# Altium PCB ANSINv01.PcbDoc
Units mm, origin at the board's own origin, x right, y up, seen from the top; angles counter-clockwise.
Board outline 75.5 x 41 mm, 4 copper layers (Top Layer, Mid-Layer 1, Mid-Layer 2, Bottom Layer); 58 components, 49 nets, 243 pads, 167 vias.
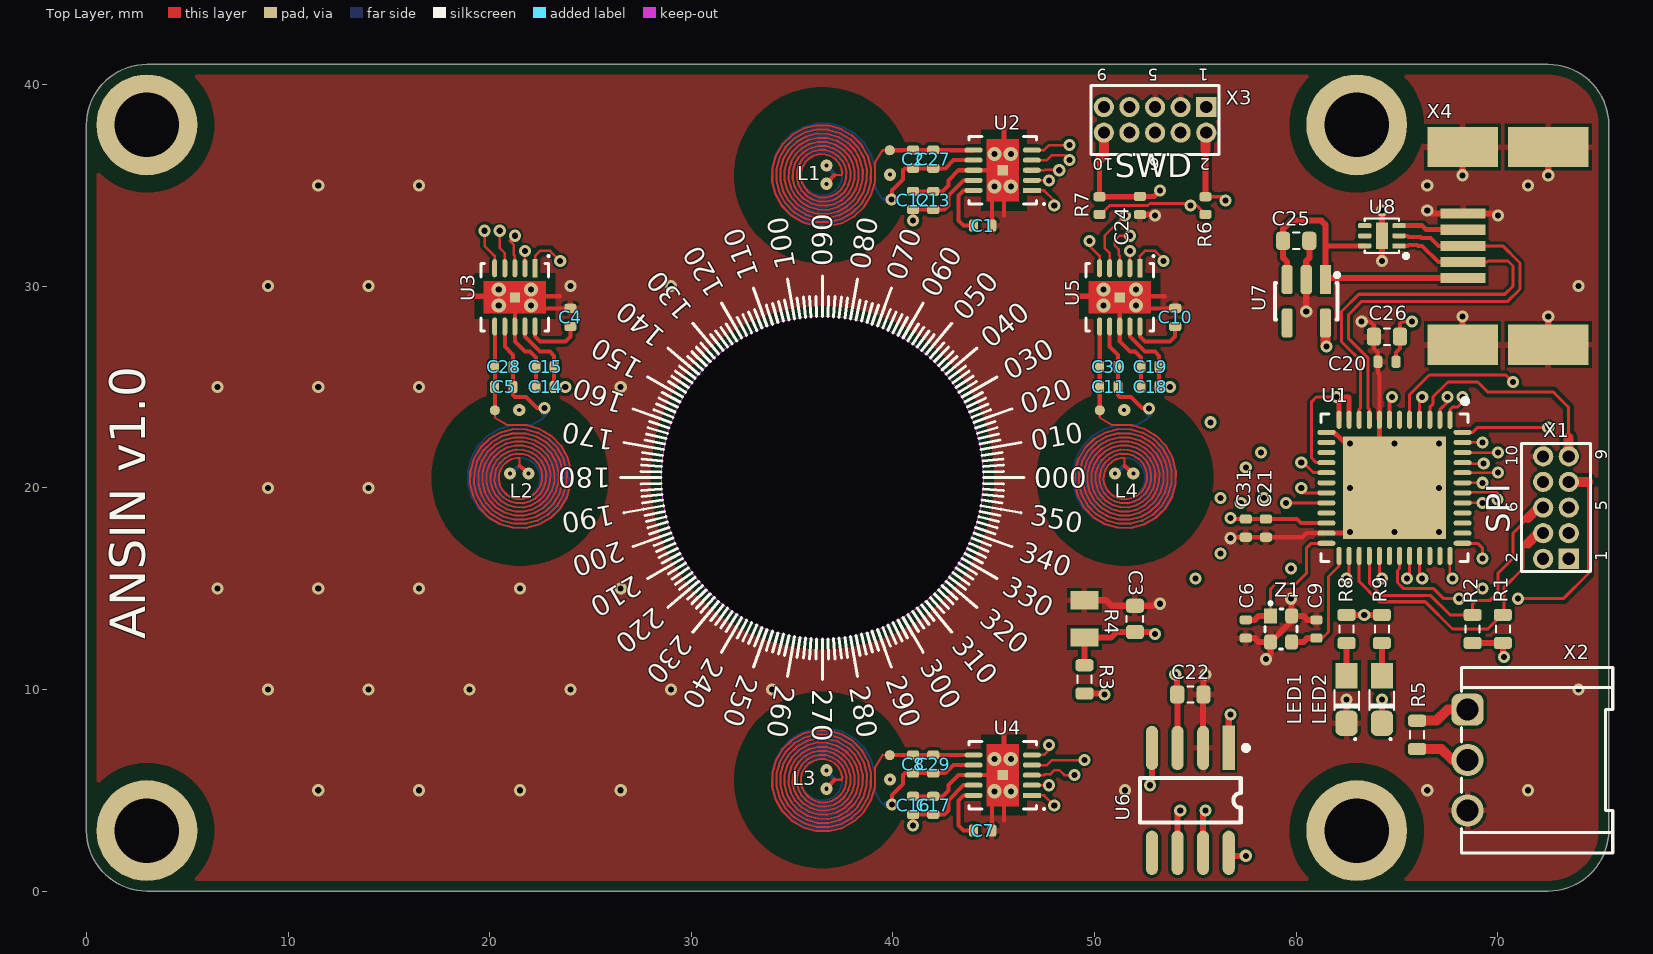
[diagram p0: Top Layer view]
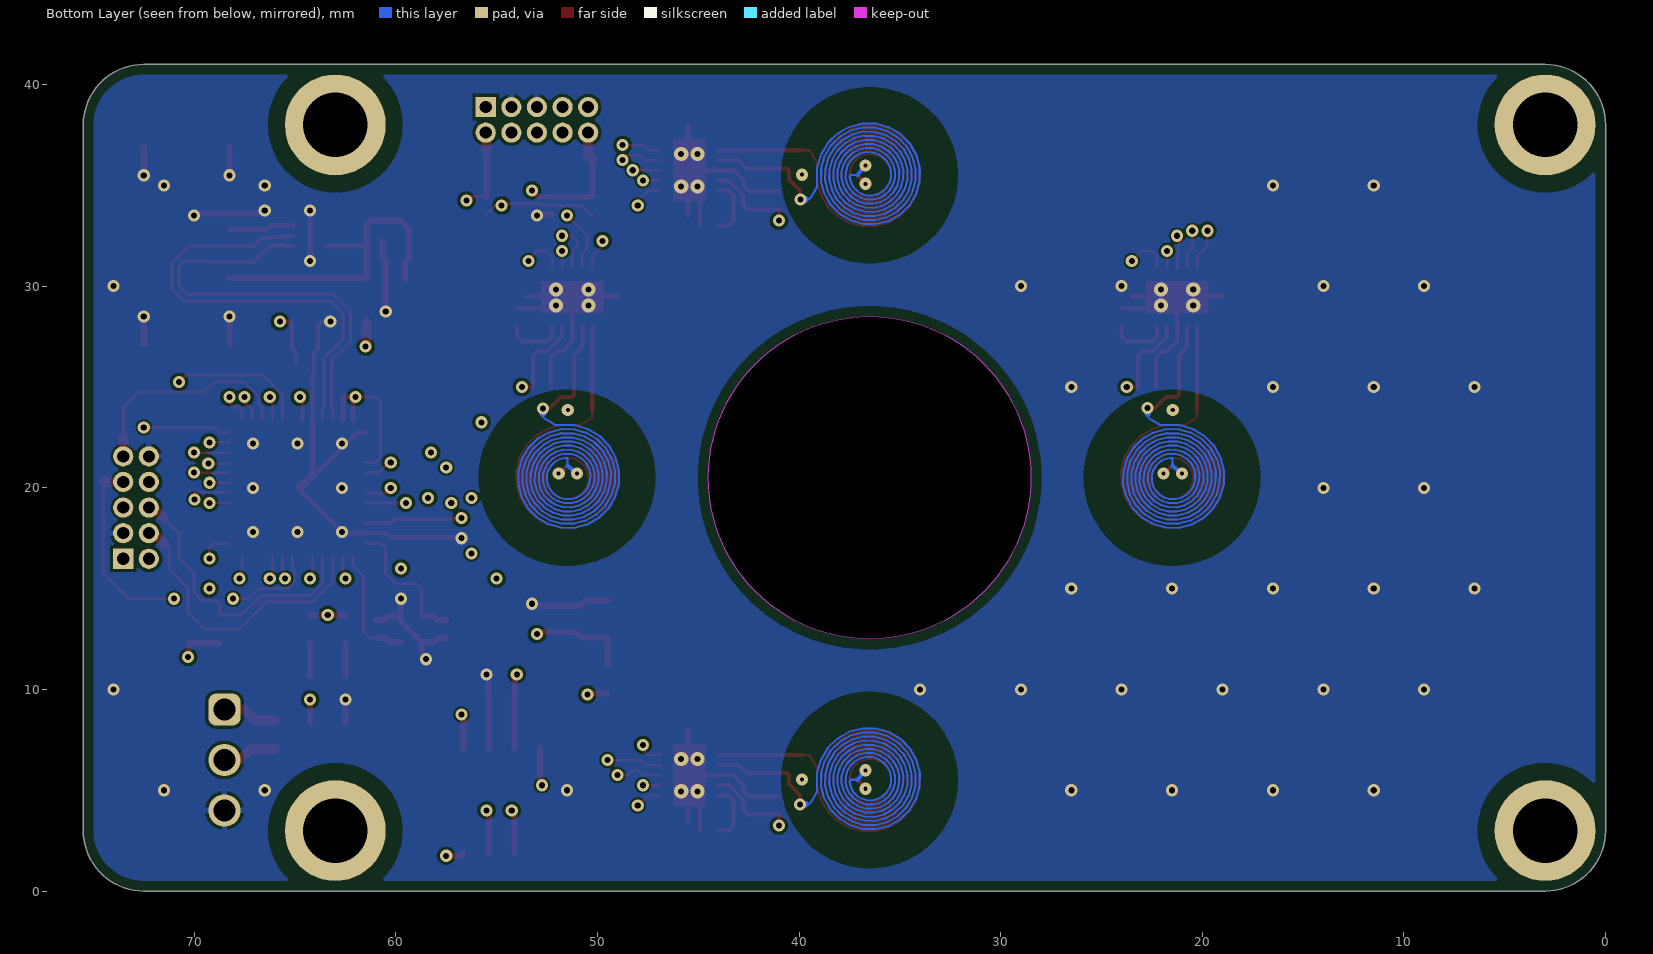
[diagram p1: Bottom Layer view, seen from below]
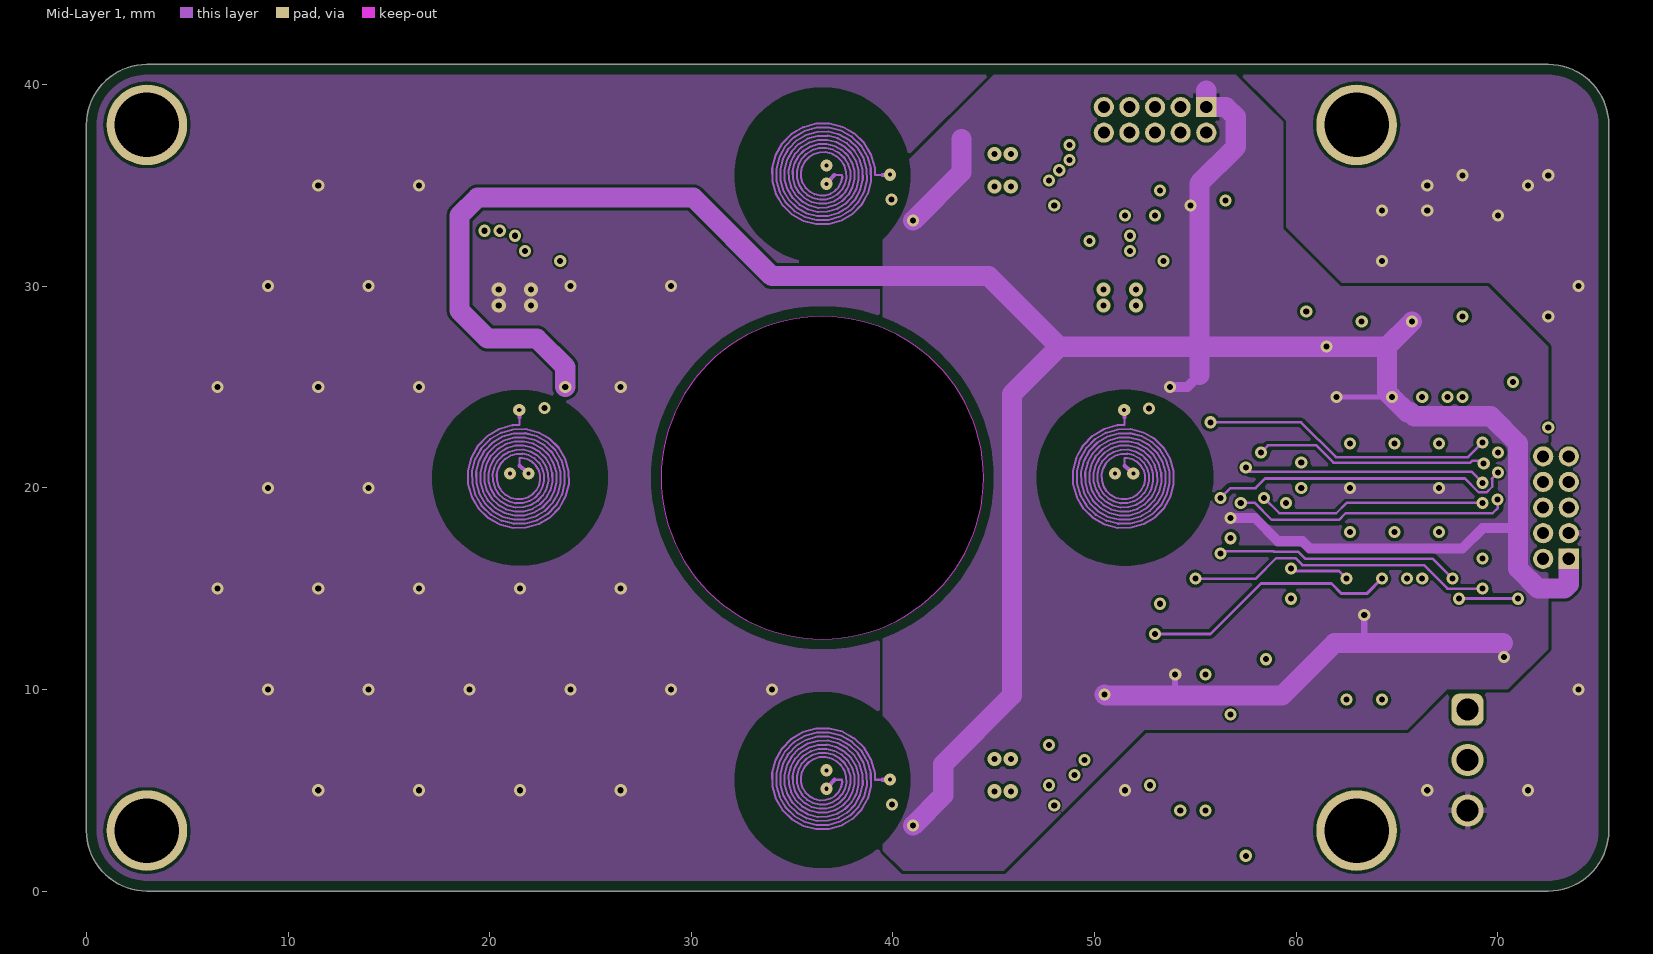
[diagram p2: Mid-Layer 1]
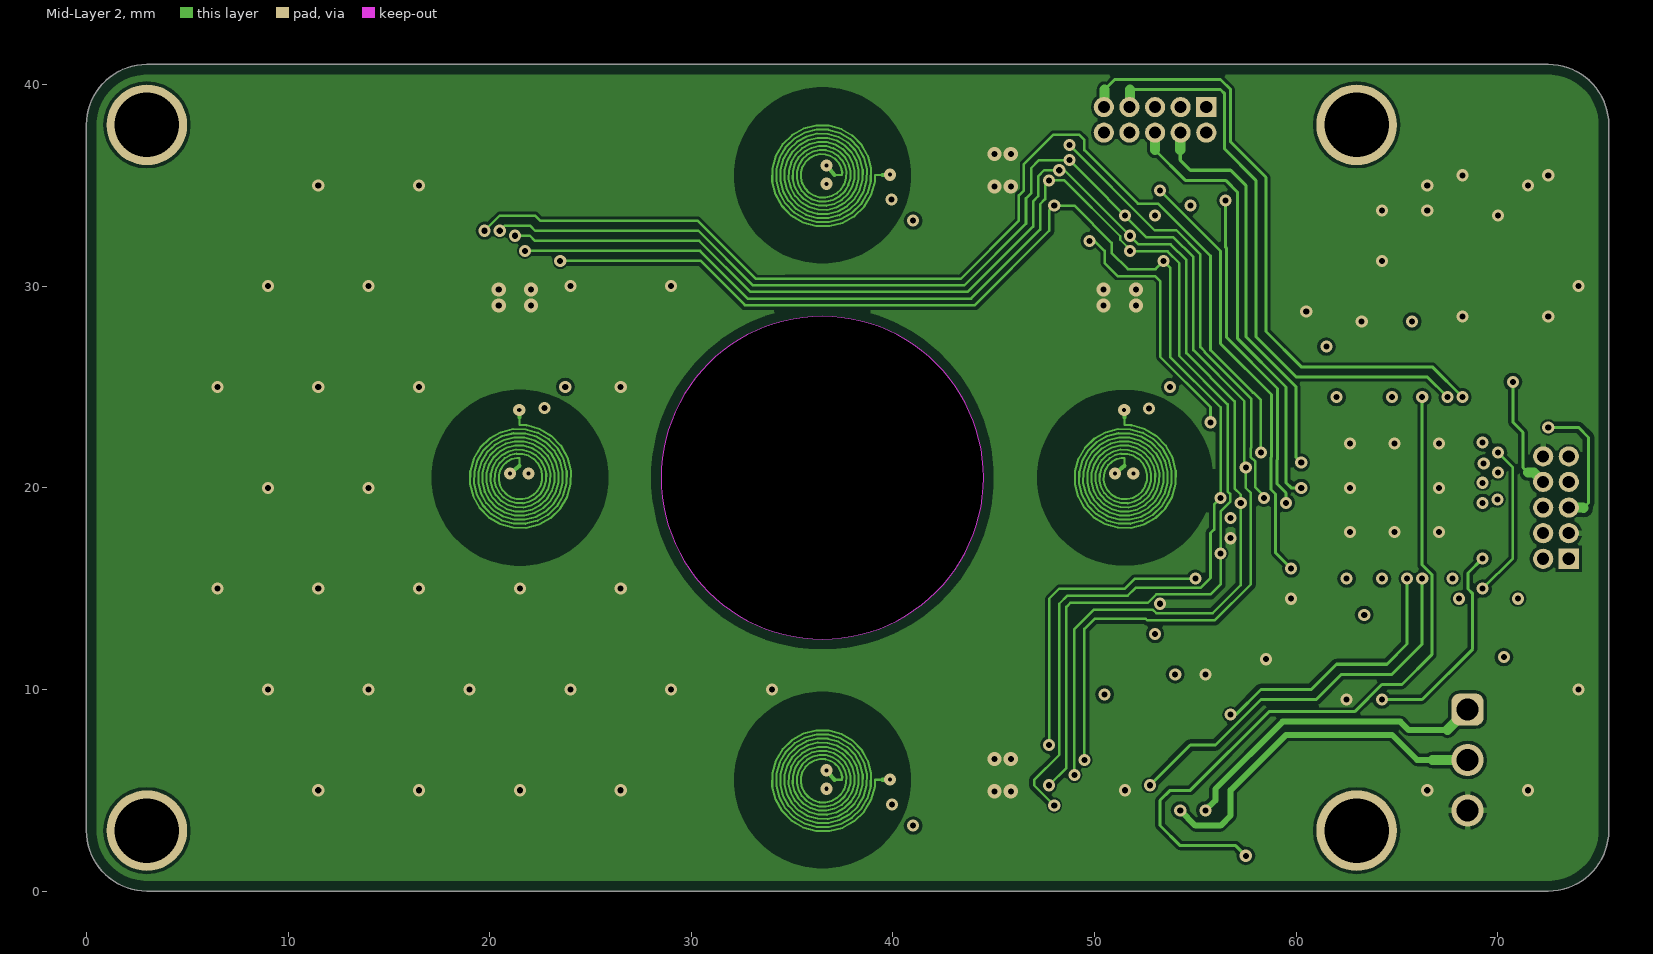
[diagram p3: Mid-Layer 2]
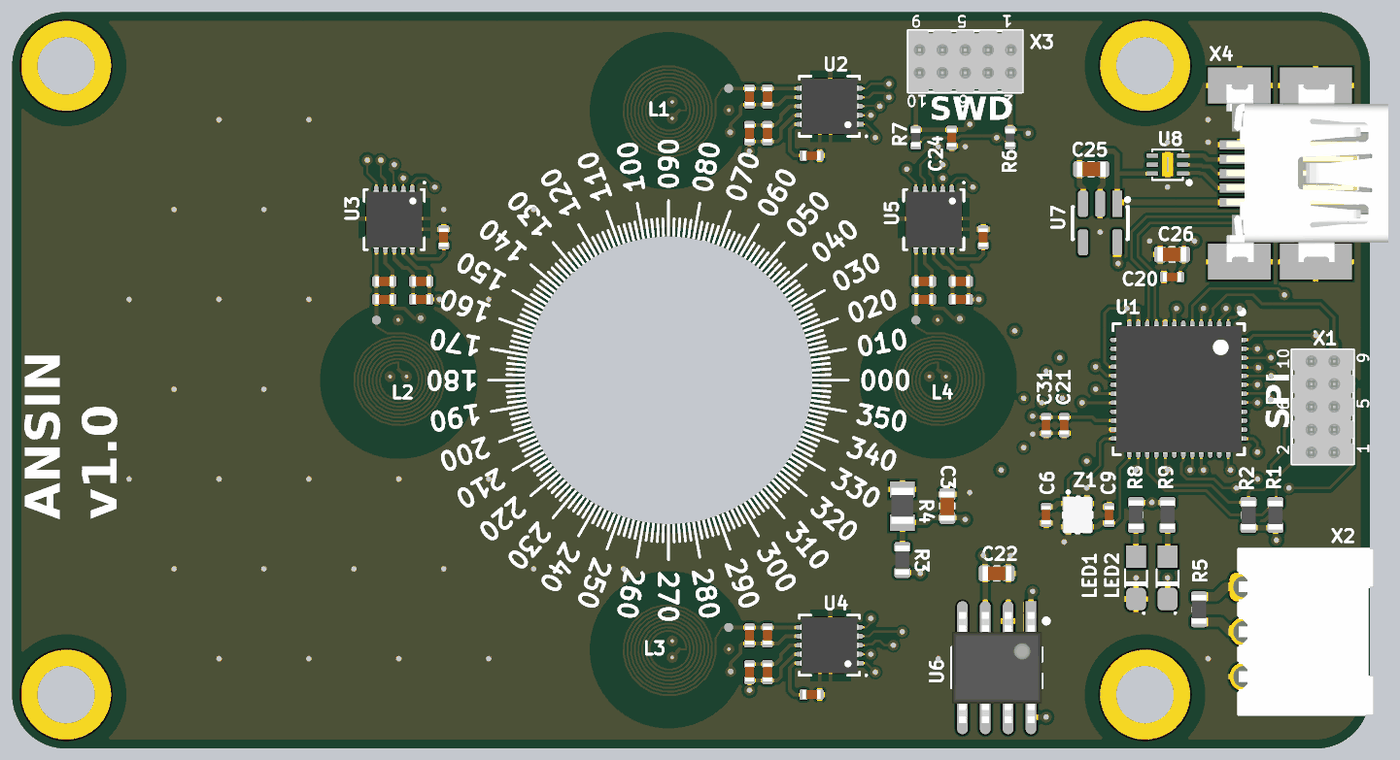
[diagram p4: 3D render of the assembled board from above, using the file's embedded part models]

## Layer stack, top to bottom
Top Solder: solder mask 0.0102, Solder Resist, Dk 3.5
Top Layer: signal copper 0.0356
Dielectric 1: dielectric 0.32, FR-4, Dk 4.8
Mid-Layer 1: signal copper 0.0356
Dielectric2: dielectric 0.32, FR-4, Dk 4.8
Mid-Layer 2: signal copper 0.0356
Dielectric3: dielectric 0.32, FR-4, Dk 4.8
Bottom Layer: signal copper 0.0356
Bottom Solder: solder mask 0.0102, Solder Resist, Dk 3.5

## Board outline
3,0 cw(c3,3) 0,3 0,38 cw(c3,38) 3,41 72.5,41 cw(c72.5,38) 75.5,38 75.5,3 cw(c72.5,3) 72.5,0
cut-out: 28.5,20.5 ccw(c36.5,20.5) 36.5,12.5 ccw(c36.5,20.5) 44.5,20.5 ccw(c36.5,20.5) 36.5,28.5 ccw(c36.5,20.5)

## Design rules (kind name [scope] priority, off if disabled: settings)
BoardOutlineClearance [(OnLayer('Bottom Layer') OR OnLayer('Top Layer') OR OnLayer('Mid-Layer 1') OR OnLayer('Mid-Layer 2'))] p1: gap=0.5 ignorepadtopadclearanceinfootprint=FALSE
Clearance Buses [(InNetClass('CAN_Bus') OR InNetClass('CLK_OUT') OR InNetClass('SPI_Bus'))] p1: gap=0.1 ignorepadtopadclearanceinfootprint=FALSE except(0: Arc-Hole Track-Hole SMDPad-Hole THPad-Hole Via-Hole Fill-Hole Poly-Hole Region-Hole Text-Hole; 0.2: Arc-Arc Arc-Track Arc-Poly Track-Track Track-Poly)
Clearance [All] p2: gap=0.15 ignorepadtopadclearanceinfootprint=FALSE except(0: Arc-Hole Track-Hole SMDPad-Hole THPad-Hole Via-Hole Fill-Hole Poly-Hole Region-Hole Text-Hole)
DiffPairsRouting [All] p1: maxlimit=1 minlimit=0.1 mostfreqgap=0.2 toplayer_minwidth=0.1 toplayer_maxwidth=1 toplayer_prefwidth=0.2 midlayer1_minwidth=0.1 midlayer1_maxwidth=1 midlayer1_prefwidth=0.2 midlayer2_minwidth=0.1 midlayer2_maxwidth=1 midlayer2_prefwidth=0.2 bottomlayer_minwidth=0.1 bottomlayer_maxwidth=1 bottomlayer_prefwidth=0.2 maxuncoupledlength=12.7
HoleSize [All] p1: absolutevalues=TRUE maxlimit=5 minlimit=0.025 maxpercent=80.000 minpercent=20.000
MinimumSolderMaskSliver [All] p1: minsoldermaskwidth=0.05
PolygonConnect "PolygonConnect Via" [All vs IsVia] p1: connectstyle=Direct reliefconductorwidth=0.254 reliefentries=4 polygonreliefangle="90 Angle" airgapwidth=0.254
PolygonConnect [All] p2: connectstyle=Relief reliefconductorwidth=0.3 reliefentries=4 polygonreliefangle="90 Angle" airgapwidth=0.15
RoutingVias [All] p1: holewidth=0.3 width=0.6 viastyle="Through Hole" minholewidth=0.2 minwidth=0.5 maxholewidth=3 maxwidth=5
SilkToSilkClearance [All] p1: silktosilkclearance=0
SilkToSolderMaskClearance [IsPad] p1: minsilkscreentomaskgap=0 clearancetoexposedcopper=TRUE
SolderMaskExpansion [All] p1: expansion=0.102 istentingtop=FALSE
Width [All] p1: maxlimit=10 minlimit=0.1 preferedwidth=0.3
25 further rules are at their usual default settings.

## Classes and differential pairs
net class CLK_OUT: CLK_OUT
net class CAN_Bus: CAN0_RX CAN0_TX
net class SPI_Bus: SPI0_SCK SPI0_SIN SPI0_SOUT SPI1_CLK SPI1_MISO SPI1_MOSI
differential pair USB: +USB_P -USB_N

## Components (designator, comment, footprint, x,y, rotation, side; value= is the part's Value field where it differs from the comment)
C1 "GRM155R71H153KA12J" 1005[0402] 44.452,33 r180 top
C2 "CBR04C101F3GAC" 1005[0402] 41,36.298 r90 top
C3 "CL10B104KA8NNND" 1608[0603] 52,13.5 r270 top
C4 "GRM155R71H153KA12J" 1005[0402] 24,28.452 r270 top
C5 "CBR04C101F3GAC" 1005[0402] 20.702,25 r180 top
C6 "04023U110FAT2A" 1005[0402] 57.5,13 r270 top
C7 "GRM155R71H153KA12J" 1005[0402] 44.452,3 r180 top
C8 "CBR04C101F3GAC" 1005[0402] 41,6.298 r90 top
C9 "04023U110FAT2A" 1005[0402] 61,13 r90 top
C10 "GRM155R71H153KA12J" 1005[0402] 54,28.452 r270 top
C11 "CBR04C101F3GAC" 1005[0402] 50.702,25 r180 top
C12 "C1005X6S1C105K050BC" 1005[0402] 41,34.25 r90 top
C13 "C0402C104K8PACTU" 1005[0402] 42,34.25 r90 top
C14 "C1005X6S1C105K050BC" 1005[0402] 22.75,25 r180 top
C15 "C0402C104K8PACTU" 1005[0402] 22.75,26 r180 top
C16 "C1005X6S1C105K050BC" 1005[0402] 41,4.25 r90 top
C17 "C0402C104K8PACTU" 1005[0402] 42,4.25 r90 top
C18 "C1005X6S1C105K050BC" 1005[0402] 52.75,25 r180 top
C19 "C0402C104K8PACTU" 1005[0402] 52.75,26 r180 top
C20 "C0402C104K8PACTU" 1005[0402] 64.5,26.25 r180 top
C21 "C0402C104K8PACTU" 1005[0402] 58.5,18 r270 top
C22 "CL10B104KA8NNND" 1608[0603] 54.75,9.75 r0 top
C24 "C0402C104K8PACTU" 1005[0402] 52.25,34 r270 top
C25 "CL10A105KO8NNNC" 1608[0603] 60,32.25 r0 top
C26 "CL10A105KO8NNNC" 1608[0603] 64.5,27.5 r180 top
C27 "CBR04C101F3GAC" 1005[0402] 42,36.298 r90 top
C28 "CBR04C101F3GAC" 1005[0402] 20.702,26 r180 top
C29 "CBR04C101F3GAC" 1005[0402] 42,6.298 r90 top
C30 "CBR04C101F3GAC" 1005[0402] 50.702,26 r180 top
C31 "C1005X6S1C105K050BC" 1005[0402] 57.5,18 r270 top
L1 "Coil" COIL_4LAYERS_8TURNS 36.5,35.5 r180 top net-tie
L2 "Coil" COIL_4LAYERS_8TURNS 21.5,20.5 r270 top net-tie
L3 "Coil" COIL_4LAYERS_8TURNS 36.5,5.5 r180 top net-tie
L4 "Coil" COIL_4LAYERS_8TURNS 51.5,20.5 r270 top net-tie
LED1 "SML-211UTT86" "0805 LED" 62.5,9.5 r270 top
LED2 "SML-211UTT86" "0805 LED" 64.25,9.5 r270 top
R1 "RL0603K004.7-1" 0603 70.25,13 r270 top
R2 "RL0603K004.7-1" 0603 68.75,13 r270 top
R3 "RL0603K010-1" 0603 49.5,10.5 r270 top
R4 "NCP21XV103J03RA" 0805 49.5,13.5 r270 top
R5 "RL0603E120-1" 0603 66,7.75 r270 top
R6 "MCR01MZPJ103" 0402 55.5,34 r270 top
R7 "MCR01MZPJ103" 0402 50.25,34 r90 top
R8 "RL0603K001-1" 0603 62.5,13 r90 top
R9 "RL0603K001-1" 0603 64.25,13 r90 top
U1 "MKS22FN256VFT12" "48-PIN QFN NXP" 64.875,20 r270 top locked
U2 "LDC1101DRCT" "TI S-PVSON-N10" 45.445,35.75 r180 top
U3 "LDC1101DRCT" "TI S-PVSON-N10" 21.25,29.445 r270 top
U4 "LDC1101DRCT" "TI S-PVSON-N10" 45.445,5.75 r180 top
U5 "LDC1101DRCT" "TI S-PVSON-N10" 51.25,29.445 r270 top
U6 "SN65HVD231D" SO-8 54.75,4.5 r180 top
U7 "LP5907QMFX-3.3Q1" SOT23-5 60.5,29.25 r180 top
U8 "PUSBM5V5X4-TL,115" DFN1616-6 64.25,32.5 r180 top
X1 "FTS-105-01-F-D" FTS-105-01-F-D 72.885,19.02 r90 top
X2 "1814854" 1814854 68.5,4 r180 top
X3 "FTS-105-01-F-D" FTS-105-01-F-D 53,38.25 r180 top
X4 "miniUSB Type AB" "USB AB 56579-0576 Molex" 74.5,32 r0 top
Z1 "ABM11-16.000MHZ-9-B1U-T" "4-SMD 2.00mm x 1.60mm" 59.25,13 r270 top

## Footprints (in the part's own frame and the unit in brackets; to place one, negate y for a bottom-side part, rotate by r counter-clockwise, add the part's x,y. Pads: shape width x height; smd on the part's side, far side on the other; paste and mask are expansions set on the pad)
"4-SMD 2.00mm x 1.60mm" [mm]
  rect 0.75x0.64 smd mask+0.06: 1(-0.65,-0.525)
  rrect50% 0.75x0.64 smd mask+0.06: 2(0.65,-0.525) 3(0.65,0.525) 4(-0.65,0.525)
  silkscreen extent -1.35,-0.8 1,0.8, body extent -1,-0.8 1,0.8, height 0.6
"48-PIN QFN NXP" [mm] "QFN, 48-Leads, Body 7.00x7.00mm, Pitch 0.50mm, Thermal Pad 5.10x5.10mm, IPC Medium Density"
  oval 0.9x0.25 smd mask+0.06: 1(-3.375,2.75) 2(-3.375,2.25) 3(-3.375,1.75) 4(-3.375,1.25) 5(-3.375,0.75) 6(-3.375,0.25) 7(-3.375,-0.25) 8(-3.375,-0.75) 9(-3.375,-1.25) 10(-3.375,-1.75) 11(-3.375,-2.25) 12(-3.375,-2.75) 25(3.375,-2.75) 26(3.375,-2.25) 27(3.375,-1.75) 28(3.375,-1.25) 29(3.375,-0.75) 30(3.375,-0.25) 31(3.375,0.25) 32(3.375,0.75) 33(3.375,1.25) 34(3.375,1.75) 35(3.375,2.25) 36(3.375,2.75)
  oval 0.25x0.9 smd mask+0.06: 13(-2.75,-3.375) 14(-2.25,-3.375) 15(-1.75,-3.375) 16(-1.25,-3.375) 17(-0.75,-3.375) 18(-0.25,-3.375) 19(0.25,-3.375) 20(0.75,-3.375) 21(1.25,-3.375) 22(1.75,-3.375) 23(2.25,-3.375) 24(2.75,-3.375) 37(2.75,3.375) 38(2.25,3.375) 39(1.75,3.375) 40(1.25,3.375) 41(0.75,3.375) 42(0.25,3.375) 43(-0.25,3.375) 44(-0.75,3.375) 45(-1.25,3.375) 46(-1.75,3.375) 47(-2.25,3.375) 48(-2.75,3.375)
  rect 5.1x5.1 smd: 49(0,0)
  silkscreen extent -4.42,-3.65 3.65,3.65, body extent -3.55,-3.55 3.55,3.55, height 0.65
0402 [mm] "Chip Resistor; Body 1.1 x 0.5 mm (LxW typ)"
  rrect50% 0.45x0.6 smd mask+0.05: 1(-0.435,0) 2(0.435,0)
  body extent -0.49,-0.25 0.51,0.25, height 0.35
0603 [mm] "Chip Resistor; Body 1.6 x 0.8 mm (LxW typ)"
  rrect50% 0.6x0.9 smd mask+0.06: 1(-0.7,0) 2(0.7,0)
  silkscreen extent -0.18,-0.35 0.18,0.35, body extent -0.79,-0.4 0.81,0.4, height 0.45
0805 [mm] "Chip Resistor; Body 2 x 1.3 mm (LxW typ)"
  rect 0.9x1.4 smd mask+0.06: 1(-0.925,0) 2(0.925,0)
  body extent -1,-0.62 1,0.63, height 0.6
"0805 LED" [mm] "0805 LED"
  rect 1.25x1.1 smd: 1(-1.175,0)
  rrect50% 1.25x1.1 smd: 2(1.175,0)
  silkscreen extent -0.48,-0.61 2.01,0.61, body extent -1.3,-0.6 1.3,0.6, height 1
1005[0402] [mm] "Chip Capacitor; Body 1.0 x 0.5 mm (LxW typ)"
  rrect50% 0.45x0.6 smd mask+0.05: 1(-0.452,0) 2(0.452,0)
  body extent -0.5,-0.25 0.5,0.25, height 0.5
1608[0603] [mm] "Chip Capacitor; Body 1.6 x 0.8 mm (LxW typ)"
  rrect50% 0.7x0.9 smd mask+0.05: 1(-0.65,0) 2(0.65,0)
  silkscreen extent -0.15,-0.41 0.15,0.41, body extent -0.79,-0.41 0.81,0.39, height 0.8
1814854 [mm]
  rrect50% 1.6x1.6 hole 1.1 mask+0.07: 1(0,-5)
  round 1.6 hole 1.1 mask+0.07: 2(0,-2.5) 3(0,0)
  silkscreen extent -7.2,-7.1 0.3,2.1, body extent -7.2,-7.1 0.6,2.1, height 5.01
COIL_4LAYERS_8TURNS [mm]
  round 0.5 smd mask+0.102: 1(-3.344,-1.242)
  round 0.5 smd far side mask+0.102: 2(-3.457,1.212)
  Top Layer lines w0.102: -0.596,-0.022 -0.979,-0.022 -0.987,-0.151 -0.929,-0.402 -0.806,-0.631 -0.627,-0.822 -0.402,-0.962 -0.147,-1.039 0.122,-1.047 0.386,-0.985 0.627,-0.856 0.827,-0.667 0.973,-0.431 1.054,-0.163 1.063,0.119 0.997,0.396 0.861,0.648 0.663,0.859 0.415,1.011 0.134,1.095 -0.161,1.104 -0.451,1.035 -0.715,0.892 -0.935,0.685 -1.094,0.425 -1.182,0.131 -1.19,-0.177 -1.118,-0.48 -0.969,-0.756 -0.751,-0.985 -0.48,-1.151 -0.174,-1.242 0.149,-1.25 0.464,-1.175 0.751,-1.019 0.99,-0.792 1.163,-0.509 1.257,-0.19 1.266,0.146 1.186,0.474 1.024,0.773 0.788,1.021 0.494,1.201 0.161,1.299 -0.188,1.307 -0.529,1.224 -0.84,1.055 -1.097,0.81 -1.284,0.504 -1.385,0.158 -1.393,-0.204 -1.307,-0.559 -1.131,-0.88 -0.876,-1.147 -0.559,-1.34 -0.2,-1.445 0.175,-1.454 0.543,-1.364 0.876,-1.181 1.153,-0.917 1.352,-0.588 1.46,-0.216 1.469,0.173 1.376,0.553 1.186,0.898 0.913,1.184 0.572,1.39 0.188,1.502 -0.215,1.51 -0.608,1.414 -0.965,1.218 -1.26,0.934 -1.473,0.582 -1.588,0.185 -1.597,-0.231 -1.497,-0.637 -1.294,-1.005 -1.001,-1.31 -0.637,-1.53 -0.227,-1.648 0.202,-1.657 0.621,-1.553 1.001,-1.344 1.315,-1.042 1.542,-0.666 1.664,-0.243 1.672,0.199 1.565,0.631 1.349,1.023 1.037,1.346 0.65,1.579 0.214,1.705 -0.242,1.714 -0.686,1.603 -1.089,1.38 -1.422,1.059 -1.662,0.661 -1.791,0.212 -1.8,-0.258 -1.686,-0.715 -1.456,-1.13 -1.126,-1.473 -0.716,-1.719 -0.254,-1.852 0.229,-1.86 0.7,-1.743 1.126,-1.506 1.478,-1.166 1.731,-0.745 1.867,-0.27 1.875,0.226 1.755,0.71 1.512,1.147 1.162,1.509 0.729,1.769 0.241,1.908 -0.268,1.917 -0.765,1.792 -1.214,1.543 -1.585,1.184 -1.852,0.739 -1.995,0.238 -2.003,-0.284 -1.875,-0.794 -1.619,-1.255 -1.25,-1.635 -0.794,-1.908 -0.281,-2.055 0.256,-2.063 0.778,-1.932 1.25,-1.669 1.64,-1.291 1.92,-0.823 2.07,-0.297 2.079,0.253 1.944,0.788 1.674,1.272 1.287,1.672 0.807,1.958 0.268,2.111 -0.295,2.12 -0.843,1.982 -1.339,1.705 -1.748,1.309 -2.041,0.818 -2.198,0.265 -2.206,-0.311 -2.065,-0.872 -1.782,-1.379 -1.375,-1.798 -0.873,-2.098 -0.307,-2.258 0.282,-2.266 0.856,-2.121 1.375,-1.832 1.803,-1.416 2.11,-0.902 2.273,-0.323 2.282,0.28 2.133,0.867 1.837,1.397 1.412,1.834 0.886,2.147 0.295,2.315 -0.322,2.323 -0.922,2.171 -1.464,1.868 -1.91,1.433 -2.23,0.896 -2.401,0.292 -2.409,-0.338 -2.254,-0.951 -1.944,-1.504 -1.5,-1.96 -0.951,-2.287 -0.334,-2.461 0.309,-2.47 0.935,-2.311 1.5,-1.994 1.966,-1.541 2.299,-0.98 2.476,-0.35 2.485,0.306 2.323,0.945 1.999,1.522 1.536,1.997 0.964,2.337 0.321,2.518 -0.349,2.526 -1,2.361 -1.588,2.031 -2.073,1.558 -2.42,0.974 -2.604,0.319 -2.613,-0.022 -2.613,-0.632 -2.978,-1.242 -3.344,-1.242
  Top Layer lines w0.203: -0.214,0.435 -0.596,-0.022
  Mid-Layer 1 lines w0.102: -0.596,-0.022 -0.979,-0.022 -0.987,0.106 -0.929,0.357 -0.806,0.586 -0.627,0.777 -0.402,0.917 -0.147,0.994 0.122,1.002 0.386,0.94 0.627,0.811 0.827,0.622 0.973,0.386 1.054,0.118 1.063,-0.164 0.997,-0.441 0.861,-0.693 0.663,-0.903 0.415,-1.056 0.134,-1.14 -0.161,-1.149 -0.451,-1.08 -0.715,-0.937 -0.935,-0.73 -1.094,-0.47 -1.182,-0.176 -1.19,0.133 -1.118,0.435 -0.969,0.711 -0.751,0.94 -0.48,1.106 -0.174,1.197 0.149,1.206 0.464,1.13 0.751,0.974 0.99,0.747 1.163,0.465 1.257,0.145 1.266,-0.191 1.186,-0.519 1.024,-0.818 0.788,-1.066 0.494,-1.246 0.161,-1.344 -0.188,-1.352 -0.529,-1.269 -0.84,-1.1 -1.097,-0.854 -1.284,-0.549 -1.385,-0.203 -1.393,0.159 -1.307,0.514 -1.131,0.836 -0.876,1.102 -0.559,1.295 -0.2,1.4 0.175,1.409 0.543,1.319 0.876,1.136 1.153,0.872 1.352,0.543 1.46,0.172 1.469,-0.218 1.376,-0.598 1.186,-0.943 0.913,-1.229 0.572,-1.435 0.188,-1.547 -0.215,-1.555 -0.608,-1.459 -0.965,-1.263 -1.26,-0.979 -1.473,-0.627 -1.588,-0.23 -1.597,0.186 -1.497,0.592 -1.294,0.96 -1.001,1.265 -0.637,1.485 -0.227,1.603 0.202,1.612 0.621,1.508 1.001,1.299 1.315,0.997 1.542,0.621 1.664,0.198 1.672,-0.244 1.565,-0.676 1.349,-1.068 1.037,-1.391 0.65,-1.624 0.214,-1.75 -0.242,-1.758 -0.686,-1.648 -1.089,-1.425 -1.422,-1.104 -1.662,-0.706 -1.791,-0.257 -1.8,0.213 -1.686,0.67 -1.456,1.085 -1.126,1.428 -0.716,1.674 -0.254,1.807 0.229,1.815 0.7,1.698 1.126,1.462 1.478,1.121 1.731,0.7 1.867,0.225 1.875,-0.271 1.755,-0.755 1.512,-1.192 1.162,-1.554 0.729,-1.814 0.241,-1.953 -0.268,-1.962 -0.765,-1.837 -1.214,-1.588 -1.585,-1.229 -1.852,-0.784 -1.995,-0.283 -2.003,0.24 -1.875,0.749 -1.619,1.21 -1.25,1.59 -0.794,1.863 -0.281,2.01 0.256,2.018 0.778,1.887 1.25,1.624 1.64,1.246 1.92,0.778 2.07,0.252 2.079,-0.298 1.944,-0.833 1.674,-1.317 1.287,-1.716 0.807,-2.003 0.268,-2.156 -0.295,-2.165 -0.843,-2.027 -1.339,-1.75 -1.748,-1.353 -2.041,-0.862 -2.198,-0.31 -2.206,0.266 -2.065,0.827 -1.782,1.335 -1.375,1.753 -0.873,2.053 -0.307,2.213 0.282,2.222 0.856,2.076 1.375,1.787 1.803,1.371 2.11,0.857 2.273,0.279 2.282,-0.325 2.133,-0.911 1.837,-1.442 1.412,-1.879 0.886,-2.192 0.295,-2.36 -0.322,-2.368 -0.922,-2.216 -1.464,-1.913 -1.91,-1.478 -2.23,-0.941 -2.401,-0.337 -2.409,0.293 -2.254,0.906 -1.944,1.459 -1.5,1.915 -0.951,2.242 -0.334,2.416 0.309,2.425 0.935,2.266 1.5,1.949 1.966,1.496 2.299,0.935 2.476,0.305 2.485,-0.351 2.323,-0.99 1.999,-1.567 1.536,-2.042 0.964,-2.382 0.321,-2.563 -0.349,-2.571 -1,-2.405 -1.588,-2.076 -2.073,-1.603 -2.42,-1.019 -2.604,-0.364 -2.613,-0.022 -2.978,-0.022
  Mid-Layer 1 lines w0.203: -0.214,0.435 -0.596,-0.022 ; -2.978,-0.022 -3.344,-0.022
  Mid-Layer 2 lines w0.102: -0.596,-0.022 -0.979,-0.022 -0.987,-0.151 -0.929,-0.402 -0.806,-0.631 -0.627,-0.822 -0.402,-0.962 -0.147,-1.039 0.122,-1.047 0.386,-0.985 0.627,-0.856 0.827,-0.667 0.973,-0.431 1.054,-0.163 1.063,0.119 0.997,0.396 0.861,0.648 0.663,0.859 0.415,1.011 0.134,1.095 -0.161,1.104 -0.451,1.035 -0.715,0.892 -0.935,0.685 -1.094,0.425 -1.182,0.131 -1.19,-0.177 -1.118,-0.48 -0.969,-0.756 -0.751,-0.985 -0.48,-1.151 -0.174,-1.242 0.149,-1.25 0.464,-1.175 0.751,-1.019 0.99,-0.792 1.163,-0.509 1.257,-0.19 1.266,0.146 1.186,0.474 1.024,0.773 0.788,1.021 0.494,1.201 0.161,1.299 -0.188,1.307 -0.529,1.224 -0.84,1.055 -1.097,0.81 -1.284,0.504 -1.385,0.158 -1.393,-0.204 -1.307,-0.559 -1.131,-0.88 -0.876,-1.147 -0.559,-1.34 -0.2,-1.445 0.175,-1.454 0.543,-1.364 0.876,-1.181 1.153,-0.917 1.352,-0.588 1.46,-0.216 1.469,0.173 1.376,0.553 1.186,0.898 0.913,1.184 0.572,1.39 0.188,1.502 -0.215,1.51 -0.608,1.414 -0.965,1.218 -1.26,0.934 -1.473,0.582 -1.588,0.185 -1.597,-0.231 -1.497,-0.637 -1.294,-1.005 -1.001,-1.31 -0.637,-1.53 -0.227,-1.648 0.202,-1.657 0.621,-1.553 1.001,-1.344 1.315,-1.042 1.542,-0.666 1.664,-0.243 1.672,0.199 1.565,0.631 1.349,1.023 1.037,1.346 0.65,1.579 0.214,1.705 -0.242,1.714 -0.686,1.603 -1.089,1.38 -1.422,1.059 -1.662,0.661 -1.791,0.212 -1.8,-0.258 -1.686,-0.715 -1.456,-1.13 -1.126,-1.473 -0.716,-1.719 -0.254,-1.852 0.229,-1.86 0.7,-1.743 1.126,-1.506 1.478,-1.166 1.731,-0.745 1.867,-0.27 1.875,0.226 1.755,0.71 1.512,1.147 1.162,1.509 0.729,1.769 0.241,1.908 -0.268,1.917 -0.765,1.792 -1.214,1.543 -1.585,1.184 -1.852,0.739 -1.995,0.238 -2.003,-0.284 -1.875,-0.794 -1.619,-1.255 -1.25,-1.635 -0.794,-1.908 -0.281,-2.055 0.256,-2.063 0.778,-1.932 1.25,-1.669 1.64,-1.291 1.92,-0.823 2.07,-0.297 2.079,0.253 1.944,0.788 1.674,1.272 1.287,1.672 0.807,1.958 0.268,2.111 -0.295,2.12 -0.843,1.982 -1.339,1.705 -1.748,1.309 -2.041,0.818 -2.198,0.265 -2.206,-0.311 -2.065,-0.872 -1.782,-1.379 -1.375,-1.798 -0.873,-2.098 -0.307,-2.258 0.282,-2.266 0.856,-2.121 1.375,-1.832 1.803,-1.416 2.11,-0.902 2.273,-0.323 2.282,0.28 2.133,0.867 1.837,1.397 1.412,1.834 0.886,2.147 0.295,2.315 -0.322,2.323 -0.922,2.171 -1.464,1.868 -1.91,1.433 -2.23,0.896 -2.401,0.292 -2.409,-0.338 -2.254,-0.951 -1.944,-1.504 -1.5,-1.96 -0.951,-2.287 -0.334,-2.461 0.309,-2.47 0.935,-2.311 1.5,-1.994 1.966,-1.541 2.299,-0.98 2.476,-0.35 2.485,0.306 2.323,0.945 1.999,1.522 1.536,1.997 0.964,2.337 0.321,2.518 -0.349,2.526 -1,2.361 -1.588,2.031 -2.073,1.558 -2.42,0.974 -2.604,0.319 -2.613,-0.022 -2.978,-0.022
  Mid-Layer 2 lines w0.203: -0.214,-0.48 -0.596,-0.022 ; -2.978,-0.022 -3.344,-0.022
  Bottom Layer region: -3.425,1.35 -3.125,1.35 -3.025,1.25 -3.025,1.15 -3.125,1.05 -3.225,1.05 -3.425,1.05
  Bottom Layer lines w0.1: -2.937,1.128 -3.025,1.2
  Bottom Layer lines w0.102: -0.596,-0.022 -0.979,-0.022 -0.987,0.106 -0.929,0.357 -0.806,0.586 -0.627,0.777 -0.402,0.917 -0.147,0.994 0.122,1.002 0.386,0.94 0.627,0.811 0.827,0.622 0.973,0.386 1.054,0.118 1.063,-0.164 0.997,-0.441 0.861,-0.693 0.663,-0.903 0.415,-1.056 0.134,-1.14 -0.161,-1.149 -0.451,-1.08 -0.715,-0.937 -0.935,-0.73 -1.094,-0.47 -1.182,-0.176 -1.19,0.133 -1.118,0.435 -0.969,0.711 -0.751,0.94 -0.48,1.106 -0.174,1.197 0.149,1.206 0.464,1.13 0.751,0.974 0.99,0.747 1.163,0.465 1.257,0.145 1.266,-0.191 1.186,-0.519 1.024,-0.818 0.788,-1.066 0.494,-1.246 0.161,-1.344 -0.188,-1.352 -0.529,-1.269 -0.84,-1.1 -1.097,-0.854 -1.284,-0.549 -1.385,-0.203 -1.393,0.159 -1.307,0.514 -1.131,0.836 -0.876,1.102 -0.559,1.295 -0.2,1.4 0.175,1.409 0.543,1.319 0.876,1.136 1.153,0.872 1.352,0.543 1.46,0.172 1.469,-0.218 1.376,-0.598 1.186,-0.943 0.913,-1.229 0.572,-1.435 0.188,-1.547 -0.215,-1.555 -0.608,-1.459 -0.965,-1.263 -1.26,-0.979 -1.473,-0.627 -1.588,-0.23 -1.597,0.186 -1.497,0.592 -1.294,0.96 -1.001,1.265 -0.637,1.485 -0.227,1.603 0.202,1.612 0.621,1.508 1.001,1.299 1.315,0.997 1.542,0.621 1.664,0.198 1.672,-0.244 1.565,-0.676 1.349,-1.068 1.037,-1.391 0.65,-1.624 0.214,-1.75 -0.242,-1.758 -0.686,-1.648 -1.089,-1.425 -1.422,-1.104 -1.662,-0.706 -1.791,-0.257 -1.8,0.213 -1.686,0.67 -1.456,1.085 -1.126,1.428 -0.716,1.674 -0.254,1.807 0.229,1.815 0.7,1.698 1.126,1.462 1.478,1.121 1.731,0.7 1.867,0.225 1.875,-0.271 1.755,-0.755 1.512,-1.192 1.162,-1.554 0.729,-1.814 0.241,-1.953 -0.268,-1.962 -0.765,-1.837 -1.214,-1.588 -1.585,-1.229 -1.852,-0.784 -1.995,-0.283 -2.003,0.24 -1.875,0.749 -1.619,1.21 -1.25,1.59 -0.794,1.863 -0.281,2.01 0.256,2.018 0.778,1.887 1.25,1.624 1.64,1.246 1.92,0.778 2.07,0.252 2.079,-0.298 1.944,-0.833 1.674,-1.317 1.287,-1.716 0.807,-2.003 0.268,-2.156 -0.295,-2.165 -0.843,-2.027 -1.339,-1.75 -1.748,-1.353 -2.041,-0.862 -2.198,-0.31 -2.206,0.266 -2.065,0.827 -1.782,1.335 -1.375,1.753 -0.873,2.053 -0.307,2.213 0.282,2.222 0.856,2.076 1.375,1.787 1.803,1.371 2.11,0.857 2.273,0.279 2.282,-0.325 2.133,-0.911 1.837,-1.442 1.412,-1.879 0.886,-2.192 0.295,-2.36 -0.322,-2.368 -0.922,-2.216 -1.464,-1.913 -1.91,-1.478 -2.23,-0.941 -2.401,-0.337 -2.409,0.293 -2.254,0.906 -1.944,1.459 -1.5,1.915 -0.951,2.242 -0.334,2.416 0.309,2.425 0.935,2.266 1.5,1.949 1.966,1.496 2.299,0.935 2.476,0.305 2.485,-0.351 2.323,-0.99 1.999,-1.567 1.536,-2.042 0.964,-2.382 0.321,-2.563 -0.349,-2.571 -1,-2.405 -1.588,-2.076 -2.073,-1.603 -2.42,-1.019 -2.604,-0.364 -2.613,-0.022 -2.613,0.587 -2.937,1.128
  Bottom Layer lines w0.203: -0.214,-0.48 -0.596,-0.022
DFN1616-6 [mm] "NXP  DFN1616-6 (SOT1189-1/XSON6)"
  rect 0.65x0.25 smd mask+0.05: 1(-0.85,0.5)
  rrect50% 0.65x0.25 smd mask+0.05: 2(-0.849,0) 3(-0.85,-0.5) 4(0.85,-0.5) 5(0.849,0) 6(0.85,0.5)
  rect 0.6x1.3 smd paste-0.25 mask+0.05: 7(0,0)
  silkscreen extent -1.3,-0.85 0.85,1.1, body extent -0.85,-0.85 0.85,0.85, height 0.5
FTS-105-01-F-D [mm]
  rect 1x1 hole 0.6 mask+0.06: 1(-2.54,-0.635)
  round 1 hole 0.6 mask+0.06: 2(-2.54,0.635) 3(-1.27,-0.635) 4(-1.27,0.635) 5(0,-0.635) 6(0,0.635) 7(1.27,-0.635) 8(1.27,0.635) 9(2.54,-0.635) 10(2.54,0.635)
  silkscreen extent -3.17,-1.71 3.18,1.71, body extent -3.17,-1.71 3.18,1.71, height 3.92
SO-8 [mm] "Small Outline; 8 Leads; Body Width 3.9 mm; Pitch 1.27 mm"
  rect 0.6x2.2 smd: 1(-1.905,-2.6)
  oval 0.6x2.2 smd: 2(-0.635,-2.6) 3(0.635,-2.6) 4(1.905,-2.6) 5(1.905,2.6) 6(0.635,2.6) 7(-0.635,2.6) 8(-1.905,2.6)
  silkscreen extent -2.88,-2.72 2.5,1.1, body extent -2.51,-3.09 2.49,3.09, height 2.16
SOT23-5 [mm] "SOT-23/SC-74A; 5 Leads; Body 3.1 x 3 mm, inc. leads (LxW max)"
  rect 0.55x1.45 smd: 1(-0.95,-1.075)
  rrect50% 0.55x1.45 smd: 2(0,-1.075) 3(0.95,-1.075) 4(0.95,1.075) 5(-0.95,1.075)
  silkscreen extent -1.63,-1.4 1.55,0.9, body extent -1.6,-0.9 1.6,0.9, height 1
"TI S-PVSON-N10" [mm] "SON, 10-Leads, Body 3.00x3.00mm, Pitch 0.50mm, Thermal Pad 2.40x1.49mm, IPC Medium Density"
  rect 0.9x0.25 smd mask+0.06: 1(-1.445,1)
  oval 0.9x0.25 smd mask+0.06: 2(-1.445,0.5) 3(-1.445,0) 4(-1.445,-0.5) 5(-1.445,-1) 6(1.445,-1) 7(1.445,-0.5) 8(1.445,0) 9(1.445,0.5) 10(1.445,1)
  rect 0.5x0.5 smd mask+0.06: 11(0,0)
  Top Layer region: -0.8,-1.55 0.8,-1.55 0.8,1.55 -0.8,1.55
  silkscreen extent -2.1,-1.68 1.67,1.72, body extent -1.6,-1.55 1.6,1.55, height 1
"USB AB 56579-0576 Molex" [mm] "USB AB 56579-0576 Molex"
  rect 2.25x0.5 smd: 1(-6.225,-1.6) 2(-6.225,-0.8) 3(-6.225,0) 4(-6.225,0.8) 5(-6.225,1.6)
  rect 3.5x2 smd: MP(-6.25,-4.9) MP(-6.25,4.9)
  rect 4x2 smd: MP(-2,-4.9) MP(-2,4.9)
  body extent -6.97,-4.93 2.03,4.98, height 3.96

## Part data
C1 C4 C7 C10: "15 nF ±10%, 50V, X7R 0402, -55°C ~ 125°C"
C2 C5 C8 C11 C27 C28 C29 C30: "100pF ±1% 25V,High Q, C0G, NP0 0402"
C3 C22: library part CVNF100K0603-25, "0.1 uF, 50V, 10% , X7R,  0603 SMD MLC Capacitor"
C6 C9: "11 pF, 25V, +-1%, NP0/COG, 0402, -55..+125"
C12 C14 C16 C18 C31: "1 µF ±10% 16V, Low ESL X6S, 0402"
C13 C15 C17 C19 C20 C21 C24: "0.1 uF, 10V, 10% , X5R,  0402, -55°C ~ 85°C"
C25 C26: "1.0 uF, 16V, 10%, X5R, 0603, -55..85 С"
L1 L2 L3 L4: library part Coil_4layers_8turns, "Coil_4layers_8turns"
LED1 LED2: "0805 red LED, hibright, 2 mA, 1.8V, 130°"
R1 R2: "4.7 K, 1%, 0603, SMD Resistor, Taped"
R3: "10 K, 1%, 0603, SMD Resistor, Taped"
R4: "Thermistor 10k, 0805, NTC"
R5: "120 R, 1%, 0603, SMD Resistor, Taped"
R6 R7: "10 K, 0402, Thick Film, -55..+155"
R8 R9: "1 K, 1%, 0603, SMD Resistor, Taped"
U1: "ARM® Cortex®-M4 Kinetis KS22 Microcontroller IC 32-Bit 120MHz 256KB (256K x 8) FLASH 48-QFN (7x7)"
U2 U3 U4 U5: "Inductance-to-Digital Converter 16 b, 24 bit 150k, 180k SPI, -40°C ~ 125°C,  10-VSON (3x3)"
U6: "3.3-V CAN TRANSCEIVERS SO-8"
U7: "LDO 3.3 V, 250 mA, Vin < 5.5V, Iq < 12uA, -40..+125 C, SOT23-5"
U8: "TVS DIODE 5.5VWM 12VC 6HXSON"
X1 X3: "Board-To-Board Connector, Vertical, FTS Series, Through Hole, Header, 10, 1.27 mm"
X2: "SSL Connector 3 Position Header, Male Pins Board to Cable/Wire 0.098\" (2.50mm) Solder"
X4: library part "USB AB 56579-0576", "SMD USB - OTG, miniUSB Type AB"
Z1: "16 MHz, 9 pF, ±10ppm, 2.00mm x 1.60mm, -20°C ~ 70°C"

## Free pads (board coordinates)
  round 5 / inner round 4 / far side round 5 hole 3.2 unplated: 0(3,3) 0(3,38) 0(63,3) 0(63,38)

## Via types
v1: diameter 0.6, hole 0.3, Top Layer to Bottom Layer, tented both sides, 131 vias
v2: diameter 0.7/0.7/0.7/0.7 (per signal layer), hole 0.3, Top Layer to Bottom Layer, 16 vias
v3: diameter 0.61/0.61/0.61/0.61 (per signal layer), hole 0.2, Top Layer to Bottom Layer, tented both sides, 12 vias
v4: diameter 0.6, hole 0.3, Top Layer to Bottom Layer, 8 vias

## Nets (pads, with @x,y where several pads share a name; then routed paths per layer and width w, separated by ;. In a path a pad name is that pad's centre, name@x,y a point inside that pad or via, vN(x,y) a via of type N, cw(c..) or ccw(c..) an arc to the next point about the centre after c; other vN are vias at no path point)
+3V3: C12.1 C13.1 C14.1 C15.1 C16.1 C17.1 C18.1 C19.1 C20.1 C21.1 C22.1 C26.1 C31.1 R1.2 R2.2 R3.2 R6.2 R7.1 R8.2 R9.2 U1.7 U1.11 U1.12 U1.16 U1.22 U2.9 U3.9 U4.9 U5.9 U6.3 U7.5 X1.1 X3.1 | length 225.2
  Top Layer w0.15: R7.1 50.315,33.565 50.75,34 52.65,34 52.75,34.1 54.65,34.1 v1(54.75,34) 55.065,34 R6.2 ; U1.16 61,21.25 60.75,21.5 60.75,24.25 61,24.5 v1(62,24.5)
  Top Layer w0.2: U3.9 21.75,27.5 22.5,26.75 23,26.75 23.202,26.548 C15.1 C14.1 v1(23.75,25) ; v1(41,3.25) C16.1 C17.1 42.548,3.798 42.75,4 42.75,4.5 43.5,5.25 U4.9 ; v1(41,33.25) C12.1 C13.1 42.548,33.798 42.75,34 42.75,34.5 43.5,35.25 U2.9 ; U5.9 51.75,27.5 52.5,26.75 53,26.75 53.202,26.548 C19.1 C18.1 v1(53.75,25) ; v1(56.75,18.5) 56.798,18.452 C31.1 C21.1 60.048,18.452 60.25,18.25 U1.22 ; U1.7 v1@64.625,24.5 ; C20.1 64.952,26.702 65.15,26.9 C26.1 65.15,28.15 65.25,28.25 v1(65.75,28.25)
  Top Layer w0.25: U1.12 62.125,24.375 v1(62,24.5) 62.6,24.5 62.625,24.475 U1.11
  Top Layer w0.3: R3.2 50.45,9.8 v1(50.5,9.75) ; v1(54,10.75) 54.1,10.65 C22.1 54.115,9.735 U6.3 ; R8.2 v1(63.375,13.7) R9.2 ; R2.2 R1.2 70.25,11.65 v1(70.3,11.6)
  Top Layer w0.5: U7.5 61.45,27.05 v1(61.5,27)
  Mid-Layer 1 w0.25: v1(62,24.5) v1(64.75,24.5)
  Mid-Layer 1 w0.3: v1(54,10.75) 54,9.815 54.115,9.7 ; v1(63.375,13.7) 63.375,12.325 63.4,12.3 ; 70.25,12.3 70.25,11.65 v1(70.3,11.6)
  Mid-Layer 1 w0.5: v1(53.75,25) 54.6,25 55.2,25.6 ; v1(56.75,18.5) 57.952,18.5 59.102,17.35 60.309,17.35 60.659,17 68.25,17 69.25,18 71,18 71.15,18
  Mid-Layer 1 w1: v1(23.75,25) 23.75,26 22.35,27.4 19.9,27.4 18.5,28.8 18.5,33.5 19.4,34.4 30.1,34.4 34,30.5 44.75,30.5 48.25,27 ; v1(41,3.25) 42.5,4.75 42.5,6.3 45.9,9.7 45.9,24.65 48.25,27 ; v1(41,33.25) 43.4,35.65 43.4,37.3 ; v1(50.5,9.75) 50.55,9.7 54.115,9.7 59.3,9.7 61.9,12.3 63.4,12.3 70.25,12.3 ; 55.2,25.6 55.2,27 ; 55.54,39.71 X3.1 56.515,38.885 57,38.4 57,36.9 55.2,35.1 55.2,27 ; v1(65.75,28.25) 64.5,27 ; X1.1 73.52,15.22 73.3,15 72,15 71,16 71,18 71,22.2 69.65,23.55 65.856,23.55 65.656,23.75 65.5,23.75 v1(64.75,24.5) 64.5,24.75 64.5,27 ; 48.25,27 55.2,27 ; 55.2,27 v1(61.5,27) 64.5,27
CAN0_RX: U1.33 U6.4 | length 22.7
  Top Layer w0.15: U1.33 66.125,15.625 v1(66.25,15.5)
  Top Layer w0.3: v1(52.75,5.25) 52.845,5.345 U6.4
  Mid-Layer 2 w0.15: v1(52.75,5.25) 54.75,7.25 56,7.25 58.25,9.5 61,9.5 62.25,10.75 64.75,10.75 66.25,12.25 v1(66.25,15.5)
CAN0_TX: U1.32 U6.1 | length 16.3
  Top Layer w0.15: v1(65.5,15.5) 65.625,15.625 U1.32
  Top Layer w0.3: U6.1 56.655,8.655 v1(56.75,8.75)
  Mid-Layer 2 w0.15: v1(56.75,8.75) 57,8.75 58.25,10 60.75,10 62,11.25 64.5,11.25 65.5,12.25 v1(65.5,15.5)
CANCTRL: U1.4 U6.8 | length 37.6
  Top Layer w0.15: U1.4 66.125,24.375 v1(66.25,24.5)
  Top Layer w0.3: U6.8 56.805,1.75 v1(57.5,1.75)
  Mid-Layer 2 w0.15: v1(57.5,1.75) 57,2.25 54.25,2.25 53.25,3.25 53.25,4.5 53.75,5 54.75,5 58.65,8.9 62.9,8.9 64.25,10.25 65.25,10.25 66.725,11.725 66.725,15.697 66.25,16.172 v1(66.25,24.5)
CANH: R5.1 U6.7 X2.1 | length 20.6
  Top Layer w0.3: U6.7 55.385,3.885 v1(55.5,4)
  Top Layer w0.5: R5.1 66.95,8.45 67.5,9 X2.1
  Mid-Layer 2 w0.3: v1(55.5,4) 56,4.5 56,5.066 59.334,8.4 65.166,8.4 65.566,8 67.5,8
  Mid-Layer 2 w0.5: 67.5,8 X2.1
CANL: R5.2 U6.6 X2.2 | length 22.6
  Top Layer w0.3: U6.6 54.115,3.865 v1(54.25,4)
  Top Layer w0.5: R5.2 67.2,7.05 67.75,6.5 X2.2
  Mid-Layer 2 w0.3: v1(54.25,4) 55,3.25 56.25,3.25 56.75,3.75 56.75,5 59.5,7.75 64.75,7.75 66,6.5 66.75,6.5
  Mid-Layer 2 w0.5: 66.75,6.5 X2.2
CLK_OUT: U1.36 U2.2 U3.2 U4.2 U5.2 | length 90.3
  Top Layer w0.125: U3.2 v1(21.75,31.75) ; U4.2 v1(47.75,5.25) ; U2.2 v1(47.75,35.25) ; U5.2 v1(51.75,31.75) ; U1.36 67.625,15.625 v1(67.75,15.5)
  Mid-Layer 1 w0.125: v1(56.25,16.75) 56.25,16.755 56.155,16.85 58.877,16.85 58.89,16.837 59.403,16.837 60.097,16.838 60.447,16.487 66.763,16.487 v1(67.75,15.5)
  Mid-Layer 2 w0.125: v1(21.75,31.75) 30.434,31.75 32.797,29.387 35.034,29.387 43.877,29.388 47.3,32.81 47.3,34.065 47.55,34.315 47.55,35.05 v1(47.75,35.25) 48.5,35.25 51.275,32.475 51.275,32.303 v1@51.828,31.75 ; v1(47.75,5.25) 48.6,6.1 48.6,14.095 48.805,14.3 52.646,14.3 53.058,14.713 55.75,14.713 56.25,15.212 v1(56.25,16.75) 56.25,18.828 56.725,19.303 56.725,19.697 56.6,19.822 56.6,24.14 54.2,26.54 54.2,31.147 53.622,31.725 51.853,31.725 v1@51.828,31.75 ; v1(51.75,31.75) v1@51.828,31.75
GND: C1.1 C3.1 C4.1 C6.2 C7.1 C9.2 C10.1 C12.2 C13.2 C14.2 C15.2 C16.2 C17.2 C18.2 C19.2 C20.2 C21.2 C22.2 C24.2 C25.2 C26.2 C31.2 LED1.2 R4.1 U1.8 U1.13 U1.23 U1.49 U2.8 U2.11 U3.8 U3.11 U4.8 U4.11 U5.8 U5.11 U6.2 U7.2 U8.7 X1.3 X1.10 X2.3 X3.3 X3.5 X4.5 X4.MP Z1.2 Z1.4 | length 92.3
  Top Layer w0.2: U3.11 U3.8 21.25,27.25 21.75,26.75 22,26.75 22.298,26.452 C15.2 C14.2 ; 21.75,29.5 23.5,29.5 ; v2(22.05,29.045) 22.191,28.904 C4.1 ; C16.2 C17.2 42.452,4.702 42.75,5 42.75,5.25 43.25,5.75 U4.8 U4.11 ; C12.2 C13.2 42.452,34.702 42.75,35 42.75,35.25 43.25,35.75 U2.8 U2.11 ; C7.1 v2@44.904,4.809 ; C1.1 v2@44.904,34.809 ; 45.5,3.5 45.5,5.25 ; 45.5,33.5 45.5,35.25 ; U5.11 U5.8 51.25,27.25 51.75,26.75 52,26.75 52.298,26.452 C19.2 C18.2 ; 51.75,29.5 53.5,29.5 ; v2@52.191,28.904 C10.1 ; v1(56.75,17.5) 56.798,17.548 C31.2 C21.2 60.298,17.548 60.5,17.75 U1.23 ; v1(63.25,28.25) 63.65,28.25 63.85,28.05 C26.2 63.85,26.9 64.048,26.702 C20.2 64.048,25.702 64.125,25.625 U1.8
  Top Layer w0.25: 19,29.5 20,29.5 ; 45.5,7 45.5,8 ; 45.5,37 45.5,38 ; 49,29.5 50,29.5 ; U1.23 62.625,17.75 v4(62.675,17.8) U1.49 ; U1.13 61.85,22.75 61.95,22.65 61.991,22.65 64.641,20 U1.49 ; U1.8 64.125,20.75 U1.49
  Top Layer w0.3: R4.1 50.575,14.425 50.85,14.15 C3.1 52.9,14.15 53,14.25 v1(53.25,14.25) ; C24.2 52.952,33.548 v1(53,33.5) ; U6.2 55.385,9.735 C22.2 55.4,10.65 v1(55.5,10.75) ; C6.2 57.952,12.548 58.15,12.35 Z1.2 ; v1(58.5,11.5) 58.725,11.725 Z1.2 ; v1(59.75,14.5) 59.775,14.475 Z1.4 ; v1(60.5,28.75) U7.2 60.5,31.25 60.65,31.4 C25.2 ; C9.2 60.548,13.452 60.35,13.65 Z1.4 ; LED1.2 v1(62.5,9.5) ; v1(64.25,31.25) U8.7 ; U8.7 v1(64.25,33.75) ; v1(66.5,33.75) 66.65,33.6 X4.5 69.9,33.6 v1(70,33.5) ; X4.MP@68.25,27.1 v1(68.25,28.5) ; v1(68.25,35.5) X4.MP@68.25,36.9 ; X4.MP@72.5,27.1 v1(72.5,28.5) ; v1(72.5,35.5) X4.MP@72.5,36.9 ; Z1.2 59.775,13.4 Z1.4
  other v1: 11.5,5 16.5,5 21.5,5 26.5,5 51.5,5 66.5,5 71.5,5 9,10 14,10 19,10 24,10 29,10 34,10 74,10 6.5,15 11.5,15 16.5,15 21.5,15 26.5,15 9,20 14,20 6.5,25 11.5,25 16.5,25 26.5,25 9,30 14,30 24,30 29,30 74,30 11.5,35 16.5,35 66.5,35 71.5,35
  other v2: 45.045,4.95 45.845,4.95 45.045,6.55 45.845,6.55 20.45,29.045 50.45,29.045 52.05,29.045 20.45,29.845 22.05,29.845 50.45,29.845 52.05,29.845 45.045,34.95 45.845,34.95 45.045,36.55 45.845,36.55
  other v4: 64.875,17.8 67.075,17.8 62.675,20 67.075,20 62.675,22.2 64.875,22.2 67.075,22.2
LPI2C0_SCL: R1.1 U1.27 X1.4 | length 14.7
  Top Layer w0.15: U1.27 63.125,15.351 64.126,14.35 66.4,14.35 67.75,13 69.5,13 70.2,13.7 R1.1 70.3,13.75 70.3,15.05 71.25,16 71.25,17 71.5,17.25
  Top Layer w0.5: 71.5,17.25 72,17.75 X1.4
LPI2C0_SDA: R2.1 U1.28 X1.6 | length 14.4
  Top Layer w0.15: U1.28 63.625,15.275 64.25,14.65 66.676,14.65 67.626,13.7 R2.1 68.75,14.25 68.9,14.4 69.6,14.4 70,14.8 70,15.75 70.75,16.5 70.75,17.75 71.5,18.5
  Top Layer w0.5: 71.5,18.5 72.02,19.02 X1.6
NetC1_2: C1.2 U2.10 | length 3
  Top Layer w0.2: C1.2 43.5,33 43.25,33.25 43.25,34.5 43.5,34.75 U2.10
NetC2_1: C2.1 C27.1 L1.2 U2.7 | length 5.4
  Top Layer w0.2: v1@39.957,34.288 39.957,34.757 40.5,35.3 40.5,35.75 40.596,35.846 C2.1 C27.1 42.596,35.846 43,36.25 U2.7
  other v1: 39.925,34.3
NetC2_2: C2.2 C27.2 L1.1 U2.6 | length 4.1
  Top Layer w0.2: L1.1 U2.6@43.992,36.742
NetC4_2: C4.2 U3.10 | length 3
  Top Layer w0.2: U3.10 22.25,27.5 22.5,27.25 23.75,27.25 24,27.5 C4.2
NetC5_1: C5.1 C28.1 L2.2 U3.7 | length 5.4
  Top Layer w0.2: U3.7 20.75,27 21.154,26.596 C28.1 C5.1 21.154,24.596 21.25,24.5 21.8,24.5 22.343,23.957 v1(22.712,23.957)
NetC5_2: C5.2 C28.2 L2.1 U3.6 | length 4.2
  Top Layer w0.2: U3.6 20.258,27.992 20.258,26 L2.1
NetC6_1: C6.1 U1.24 Z1.1 | length 7.1
  Top Layer w0.15: Z1.1 58.725,14.975 59,15.25 60,15.25 60.5,15.75 60.5,17 60.75,17.25 U1.24
  Top Layer w0.3: C6.1 57.952,13.452 58.15,13.65 Z1.1
NetC7_2: C7.2 U4.10 | length 3
  Top Layer w0.2: C7.2 43.5,3 43.25,3.25 43.25,4.5 43.5,4.75 U4.10
NetC8_1: C8.1 C29.1 L3.2 U4.7 | length 5.4
  Top Layer w0.2: v1(39.957,4.288) 39.957,4.757 40.5,5.3 40.5,5.75 40.596,5.846 C8.1 C29.1 42.596,5.846 43,6.25 U4.7
NetC8_2: C8.2 C29.2 L3.1 U4.6 | length 4.1
  Top Layer w0.2: L3.1 U4.6@43.992,6.742
NetC9_1: C9.1 U1.25 Z1.3 | length 6
  Top Layer w0.15: C9.1 61.298,12.548 61.6,12.85 61.6,15.6 62.125,16.125 U1.25
  Top Layer w0.3: Z1.3 60.35,12.35 60.548,12.548 C9.1
NetC10_2: C10.2 U5.10 | length 3
  Top Layer w0.2: U5.10 52.25,27.5 52.5,27.25 53.75,27.25 54,27.5 C10.2
NetC11_1: C11.1 C30.1 L4.2 U5.7 | length 5.4
  Top Layer w0.2: U5.7 50.75,27 51.154,26.596 C30.1 C11.1 51.154,24.596 51.25,24.5 51.8,24.5 52.343,23.957 v1@52.712,23.957
  other v1: 52.7,23.925
NetC11_2: C11.2 C30.2 L4.1 U5.6 | length 4.1
  Top Layer w0.2: L4.1 50.258,26 U5.6@50.258,27.992
NetLED1_1: LED1.1 R8.1 | length 1.6
  Top Layer w0.3: LED1.1 R8.1
NetLED2_1: LED2.1 R9.1 | length 1.6
  Top Layer w0.3: LED2.1 R9.1
NetLED2_2: LED2.2 U1.37 | length 13.2
  Top Layer w0.15: U1.37 69,17.25 69.25,17 v1(69.25,16.5)
  Top Layer w0.3: LED2.2 v1(64.25,9.5)
  Mid-Layer 2 w0.15: v1(64.25,9.5) 66.25,9.5 68.75,12 68.75,14.75 68.521,14.979 68.521,15.771 v1(69.25,16.5)
NetU8_3: U8.3 X4.4 | length 3.3
  Top Layer w0.25: U8.3 66.25,33 66.45,32.8 X4.4
RESET: C24.1 R7.2 U1.26 X3.10 | length 32
  Top Layer w0.15: v1(62.5,15.5) 62.625,15.625 U1.26
  Top Layer w0.25: 50.25,36.286 R7.2 52.233,34.435 C24.1 52.952,34.452 v1(53.25,34.75)
  Top Layer w0.5: 50.25,36.286 50.46,36.496 X3.10
  Mid-Layer 1 w0.15: v1(59.75,16) 59.875,15.875 62.125,15.875 v1(62.5,15.5)
  Mid-Layer 2 w0.15: v1(53.25,34.75) 56.25,31.75 56.25,27.15 58.775,24.625 58.775,21.533 58.75,21.508 58.75,19.922 58.975,19.697 58.975,16.775 v1(59.75,16)
SPI0_CS0: U1.41 U2.5 | length 36.5
  Top Layer w0.125: U2.5 47.5,36.75 47.75,37 v1(48.75,37) ; U1.41 v1(69.25,19.25)
  Mid-Layer 1 w0.125: v1(58.4,19.5) 59.162,18.737 61.987,18.737 62.5,19.25 v1(69.25,19.25)
  Mid-Layer 2 w0.125: v1(48.75,37) 52.975,32.775 54.057,32.775 55.25,31.582 55.25,26.975 55.475,26.75 55.475,26.715 57.74,24.45 57.775,24.415 57.775,22 57.737,21.962 57.737,21.538 57.975,21.3 57.975,20.025 58.4,19.6 v1(58.4,19.5)
SPI0_CS1: U1.45 U3.5 | length 70.4
  Top Layer w0.125: v1(19.75,32.75) 19.75,32 20.25,31.5 U3.5 ; U1.45 68.3,21.2 v1(69.3,21.2)
  Mid-Layer 1 w0.125: v1(58.25,21.75) 58.6,22.1 61,22.1 61.85,21.25 68.639,21.25 68.739,21.35 69.15,21.35 v1(69.3,21.2)
  Mid-Layer 2 w0.125: v1(19.75,32.75) 20.5,33.5 22.25,33.5 22.5,33.25 30.313,33.25 33.201,30.362 34.63,30.362 43.363,30.363 46.25,33.25 46.25,34.5 46.5,34.75 46.5,36.055 47.958,37.513 49.238,37.513 49.5,37.25 49.5,36.75 52.15,34.1 53.15,34.1 55.75,31.5 55.75,26.828 57.854,24.725 57.889,24.725 58.25,24.364 v1(58.25,21.75)
SPI0_CS2: U1.46 U4.5 | length 40.9
  Top Layer w0.125: U4.5 47.5,6.75 47.75,7 v1(47.75,7.25) ; U1.46 69.025,21.75 69.038,21.738 69.462,21.738 69.475,21.75 v1(70,21.75)
  Mid-Layer 1 w0.125: v1(55,15.5) 58,15.5 59.013,16.513 59.962,16.513 60.312,16.162 66.338,16.162 67.5,15 v1(69.25,15)
  Mid-Layer 2 w0.125: v1(47.75,7.25) 47.75,14.5 48.25,15 51.5,15 52,15.5 v1(55,15.5) ; v1(69.25,15) 70.75,16.5 70.75,21 v1(70,21.75)
SPI0_CS3: U1.47 U5.5 | length 29.8
  Top Layer w0.125: v1(49.75,32.25) 49.75,32 50.25,31.5 U5.5 ; U1.47 v1(69.25,22.25)
  Mid-Layer 1 w0.125: v1(55.75,23.25) 60.239,23.25 61.964,21.525 68.525,21.525 v1(69.25,22.25)
  Mid-Layer 2 w0.125: v1(49.75,32.25) 50,32.25 50.5,31.75 50.5,31.14 51.14,30.5 53,30.5 53.25,30.25 53.25,26.5 55.75,24 v1(55.75,23.25)
SPI0_SCK: U1.42 U2.3 U3.3 U4.3 U5.3 | length 97
  Top Layer w0.125: 21,32.25 21.2,32.05 21.2,31.55 21.25,31.5 U3.3 ; U4.3 47.5,5.75 47.55,5.8 47.823,5.8 48.023,6 48.25,6 48.5,5.75 v1(49,5.75) ; U2.3 47.508,35.75 47.533,35.775 48.225,35.775 v1(48.25,35.75) ; U5.3 51.25,31.5 51.2,31.55 51.2,31.823 51,32.023 51,32.25 51.25,32.5 v1(51.75,32.5) ; U1.42 68.275,19.775 69.975,19.775 v1(69.975,19.425)
  Mid-Layer 1 w0.125: v1(57.25,19.25) 57.95,19.25 58.787,18.412 62.122,18.412 62.46,18.75 69.75,18.75 70,19 70,19.4 v1(69.975,19.425)
  Mid-Layer 2 w0.125: v1(21.25,32.5) 22,32.5 22.25,32.25 30.394,32.25 32.931,29.712 34.9,29.712 43.707,29.713 46.95,32.955 46.95,34.21 47.2,34.46 47.2,35.45 47.5,35.75 v1(48.25,35.75) 48.5,35.75 v1(51.75,32.5) 52.175,32.075 53.767,32.075 54.55,31.292 54.55,26.685 56.95,24.285 56.95,19.967 57.25,19.667 v1(57.25,19.25) 57.25,15.177 55.861,13.787 53.058,13.787 52.896,13.95 49.955,13.95 49,12.995 v1@49,6
SPI0_SIN: U1.44 U2.1 U3.1 U4.1 U5.1 | length 95.3
  Top Layer w0.125: U3.1 22.25,31.5 22.5,31.75 23,31.75 v1(23.5,31.25) ; U4.1 47.5,4.75 v1(48,4.25) ; U2.1 47.5,34.75 48,34.25 v1(48,34) ; U5.1 52.25,31.5 52.5,31.75 53,31.75 53.425,31.325 v1(53.425,31.25) ; U1.44 69.096,20.75 69.108,20.737 69.491,20.737 69.504,20.75 v1(70,20.75)
  Mid-Layer 1 w0.125: v1(56.25,19.5) 56.738,19.988 57.988,19.988 58.462,20.462 68.366,20.462 69.053,19.775 69.447,19.775 69.725,20.053 69.725,20.447 69.711,20.461 v1(70,20.75)
  Mid-Layer 2 w0.125: v1(23.5,31.25) 30.475,31.25 32.662,29.062 35.169,29.062 44.062,29.062 47.75,32.75 47.75,33.75 v1(48,34) 49,34 50.85,32.15 50.85,31.65 51.65,30.85 53.025,30.85 v1(53.425,31.25) 53.75,30.925 53.75,26.495 56.25,23.995 v1(56.25,19.5) 55.925,19.175 55.925,17.925 55.75,17.75 55.75,15.538 55.25,15.038 52.032,15.038 51.645,14.65 48.65,14.65 48.25,14.25 48.25,6.75 47,5.5 47,5.25 v1(48,4.25)
SPI0_SOUT: U1.43 U2.4 U3.4 U4.4 U5.4 | length 97.8
  Top Layer w0.125: v1(20.5,32.75) 20.5,31.886 20.75,31.636 20.75,31.25 U3.4 ; U4.4 47.636,6.25 47.886,6.5 v1(49.5,6.5) ; U2.4 47.636,36.25 47.886,36.5 48.5,36.5 v1(48.75,36.25) ; U5.4 50.75,31.636 50.5,31.886 50.5,32.5 v1(51.5,33.5) ; U1.43 v1(69.25,20.25)
  Mid-Layer 1 w0.125: v1(57.5,21) 57.713,20.787 68.712,20.787 v1(69.25,20.25)
  Mid-Layer 2 w0.125: v1(20.5,32.75) 20.75,33 22,33 22.25,32.75 30.353,32.75 33.066,30.037 34.765,30.037 43.537,30.038 46.6,33.1 46.6,34.355 46.85,34.605 46.85,35.85 47.25,36.25 v1(48.75,36.25) 52.575,32.425 53.912,32.425 54.9,31.437 54.9,26.83 57.425,24.305 57.425,22.109 57.412,22.097 57.412,21.088 v1(57.5,21) 57.5,20 57.75,19.75 57.75,15.217 55.958,13.425 52.615,13.425 52.54,13.5 50,13.5 49.5,13 v1(49.5,6.5)
SPI1_CLK: U1.3 X1.9 | length 11.2
  Top Layer w0.15: U1.3 66.625,24 66.775,24.15 66.775,24.5 67.525,25.25 69,25.25 69.5,24.75 72.75,24.75 73.5,24 73.5,22.5
  Top Layer w0.5: 73.5,22.5 73.5,21.58 X1.9
SPI1_CS0: U1.5 X1.8 | length 12.7
  Top Layer w0.15: U1.5 65.625,24.625 66.6,25.6 70.4,25.6 v1(70.75,25.25)
  Mid-Layer 2 w0.15: v1(70.75,25.25) 70.75,23.25 71.25,22.75 71.25,21 71.5,20.75
  Mid-Layer 2 w0.5: 71.5,20.75 71.79,20.75 X1.8
SPI1_MISO: U1.31 X1.7 | length 17.2
  Top Layer w0.15: U1.31 65.125,16 65.025,15.9 65.025,15.303 65.328,15 66.821,15 67.321,14.5 v1(68.078,14.5) ; v1(71,14.5) 73.25,14.5 74.5,15.75 74.5,20.25 74.46,20.29
  Top Layer w0.5: X1.7 74.46,20.29
  Mid-Layer 1 w0.15: v1(68.078,14.5) v1(71,14.5)
SPI1_MOSI: U1.48 X1.5 | length 10.9
  Top Layer w0.15: U1.48 68.75,22.75 69,23 v1(72.5,23)
  Mid-Layer 2 w0.15: v1(72.5,23) 74,23 74.5,22.5 74.5,19.25 74.25,19
  Mid-Layer 2 w0.5: X1.5 74.23,19.02 74.25,19
SWD_CLK: U1.17 X3.4 | length 21.5
  Top Layer w0.15: v1(60.25,21.25) 60.364,21.25 60.864,20.75 U1.17
  Mid-Layer 2 w0.15: 54.25,36.75 54.25,36.25 54.75,35.75 56.75,35.75 57.5,35 57.5,27.5 60,25 60,21.5 v1(60.25,21.25)
  Mid-Layer 2 w0.5: 54.25,36.75 54.25,37.595 X3.4
SWD_DIO: R6.1 U1.20 X3.2 | length 22.5
  Top Layer w0.15: R6.1 56.315,34.435 v1(56.5,34.25) ; v1(59.5,19.25) U1.20
  Top Layer w0.3: R6.1 55.5,36.75
  Top Layer w0.5: 55.5,36.75 55.5,37.575 X3.2
  Mid-Layer 2 w0.15: v1(56.5,34.25) 56.5,31.924 56.55,31.874 56.55,27.45 59.075,24.925 59.075,21.408 59.05,21.383 59.05,20.2 59.5,19.75 v1(59.5,19.25)
SWO: U1.19 X3.6 | length 23.6
  Top Layer w0.15: v1(60.25,20) 60.25,19.75 U1.19
  Mid-Layer 2 w0.15: 53,36.75 54.5,35.25 56.5,35.25 57.1,34.65 57.1,27.4 59.5,25 59.5,20.25 59.75,20 v1(60.25,20)
  Mid-Layer 2 w0.5: 53,36.75 X3.6
TEMP: C3.2 R3.1 R4.2 U1.29 | length 19
  Top Layer w0.15: U1.29 64.125,15.625 v1(64.25,15.5)
  Top Layer w0.3: R3.1 R4.2 50.825,12.575 51.1,12.85 C3.2 52.9,12.85 v1(53,12.75)
  Mid-Layer 1 w0.15: v1(53,12.75) 55.75,12.75 58.25,15.25 61.75,15.25 62.25,14.75 63,14.75 63.5,14.75 v1(64.25,15.5)
UART1_RX: U1.2 X3.7 | length 30.7
  Top Layer w0.15: U1.2 67.125,23.875 67.5,24.25 v1(67.5,24.5)
  Mid-Layer 2 w0.15: X3.7 X3.7@51.73,39.23 ; 51.75,39.75 56.25,39.75 56.45,39.55 56.45,36.8 58,35.25 58,27.5 60,25.5 66.5,25.5 v1(67.5,24.5)
  Mid-Layer 2 w0.5: X3.7 51.75,38.905 51.75,39.75
UART1_TX: U1.1 X3.9 | length 32.9
  Top Layer w0.15: U1.1 67.625,23.875 67.75,24 68,24 68.25,24.25 v1(68.25,24.5)
  Mid-Layer 2 w0.15: 50.5,39.75 51,40.25 56.25,40.25 56.75,39.75 56.75,37.15 58.5,35.4 58.5,27.75 60.25,26 66.75,26 v1(68.25,24.5)
  Mid-Layer 2 w0.5: X3.9 50.5,38.925 50.5,39.75
USB_BUS: C25.1 U7.1 U7.3 U8.6 X4.1 | length 16.5
  Top Layer w0.25: 61.45,32 U8.6
  Top Layer w0.3: U7.3 59.55,31.2 59.35,31.4 C25.1 59.35,32.85 59.75,33.25 61.25,33.25 61.45,33.05 61.45,32 U7.1 61.525,30.4 X4.1
USB_N: U1.10 U8.1 X4.2 | length 22
  Top Layer w0.15: U1.10 63.125,23.9 63.2,23.975 63.2,26.3 62.4,27.1 62.25,27.25 62.25,28.745 63.105,29.6 70.35,29.6 70.75,30 70.75,31 70.5,31.25 69.525,31.25 69.475,31.2 X4.2
  Top Layer w0.2: U8.1 65.525,32 65.575,32.05 66,32.05 66.05,32 66.25,32 67.05,31.2 X4.2
USB_P: U1.9 U8.2 X4.3 | length 22.5
  Top Layer w0.15: U1.9 63.625,23.9 63.55,23.975 63.55,26.445 62.6,27.395 62.6,28.6 63.25,29.25 70.495,29.25 70.997,29.753 71.1,29.855 71.1,31.145 70.997,31.247 70.245,32 X4.3
  Top Layer w0.2: U8.2 65.524,32.5 65.574,32.45 66.166,32.45 66.216,32.4 66.65,32.4 67.05,32 X4.3
pads on no net: U1.6 U1.14 U1.15 U1.18 U1.21 U1.30 U1.34 U1.35 U1.38 U1.39 U1.40 U6.5 U7.4 U8.4 U8.5 X1.2 X3.8
copper on no net:
  other v3: 36.706,5.075 39.855,5.533 36.706,5.99 21.01,20.706 21.925,20.706 51.01,20.706 51.925,20.706 21.467,23.855 51.467,23.855 36.706,35.075 39.855,35.533 36.706,35.99

## Polygon pours and split planes (outlines as drawn)
+3V3 on Mid-Layer 1 "+3V3_L02_P000" (solid, remove dead copper, pour order 0): 39.5,33 39.5,35 40.5,36 45.5,41 56.5,41 58.5,39 59.35,38.15 59.35,32.85 62.2,30 62.5,30 69.5,30 72.5,27 72.5,12 70.5,10 67.5,10 65.5,8 52.5,8 49.5,5 45.5,1 42.5,1 40.5,1 39.5,2 39.5,15 39.5,23 39.5,27
GND on Mid-Layer 1 "GND_L02_P002" (solid, remove dead copper, pour order 2): -0.5,41 -0.5,0 75.5,0 75.5,41
GND on Bottom Layer "GND_L04_P004" (solid, remove dead copper, pour order 4): -0.5,0 -0.5,41 75.5,41 75.5,0
GND on Mid-Layer 2 "GND_L03_P006" (solid, remove dead copper, pour order 6): -0.5,0 -0.5,41 75.5,41 75.5,0
GND on Top Layer "GND_L01_P008" (solid, remove dead copper, pour order 8): -0.5,0 -0.5,41 75.5,41 75.5,0

## Other copper
Top Layer:
  pour cut-out: 63,-0.354 cw(c63,3) 59.646,3 cw(c63,3) 63,6.354 cw(c63,3) 66.354,3 cw(c63,3)
  pour cut-out: 3,-0.354 cw(c3,3) -0.354,3 cw(c3,3) 3,6.354 cw(c3,3) 6.354,3 cw(c3,3)
  pour cut-out: 3,34.646 cw(c3,38) -0.354,38 cw(c3,38) 3,41.354 cw(c3,38) 6.354,38 cw(c3,38)
  pour cut-out: 63,34.646 cw(c63,38) 59.646,38 cw(c63,38) 63,41.354 cw(c63,38) 66.354,38 cw(c63,38)
  pour cut-out: 17.125,20.5 ccw(c21.5,20.5) 21.5,16.125 ccw(c21.5,20.5) 25.875,20.5 ccw(c21.5,20.5) 21.5,24.875 ccw(c21.5,20.5)
  pour cut-out: 32.125,5.5 ccw(c36.5,5.5) 36.5,1.125 ccw(c36.5,5.5) 40.875,5.5 ccw(c36.5,5.5) 36.5,9.875 ccw(c36.5,5.5)
  pour cut-out: 32.125,35.5 ccw(c36.5,35.5) 36.5,31.125 ccw(c36.5,35.5) 40.875,35.5 ccw(c36.5,35.5) 36.5,39.875 ccw(c36.5,35.5)
  pour cut-out: 47.125,20.5 ccw(c51.5,20.5) 51.5,16.125 ccw(c51.5,20.5) 55.875,20.5 ccw(c51.5,20.5) 51.5,24.875 ccw(c51.5,20.5)
  pour cut-out: 23.25,28.39 19.25,28.39 19.25,30.64 23.25,30.64
  pour cut-out: 53.25,28.39 49.25,28.39 49.25,30.64 53.25,30.64
  pour cut-out: 44.39,3.75 44.39,7.75 46.64,7.75 46.64,3.75
  pour cut-out: 44.39,33.75 44.39,37.75 46.64,37.75 46.64,33.75
Mid-Layer 1:
  pour cut-out: 32.125,5.5 ccw(c36.5,5.5) 36.5,1.125 ccw(c36.5,5.5) 40.875,5.5 ccw(c36.5,5.5) 36.5,9.875 ccw(c36.5,5.5)
  pour cut-out: 47.125,20.5 ccw(c51.5,20.5) 51.5,16.125 ccw(c51.5,20.5) 55.875,20.5 ccw(c51.5,20.5) 51.5,24.875 ccw(c51.5,20.5)
  pour cut-out: 32.125,35.5 ccw(c36.5,35.5) 36.5,31.125 ccw(c36.5,35.5) 40.875,35.5 ccw(c36.5,35.5) 36.5,39.875 ccw(c36.5,35.5)
  pour cut-out: 17.125,20.5 ccw(c21.5,20.5) 21.5,16.125 ccw(c21.5,20.5) 25.875,20.5 ccw(c21.5,20.5) 21.5,24.875 ccw(c21.5,20.5)
Mid-Layer 2:
  pour cut-out: 47.125,20.5 ccw(c51.5,20.5) 51.5,16.125 ccw(c51.5,20.5) 55.875,20.5 ccw(c51.5,20.5) 51.5,24.875 ccw(c51.5,20.5)
  pour cut-out: 32.125,35.5 ccw(c36.5,35.5) 36.5,31.125 ccw(c36.5,35.5) 40.875,35.5 ccw(c36.5,35.5) 36.5,39.875 ccw(c36.5,35.5)
  pour cut-out: 17.125,20.5 ccw(c21.5,20.5) 21.5,16.125 ccw(c21.5,20.5) 25.875,20.5 ccw(c21.5,20.5) 21.5,24.875 ccw(c21.5,20.5)
  pour cut-out: 32.125,5.5 ccw(c36.5,5.5) 36.5,1.125 ccw(c36.5,5.5) 40.875,5.5 ccw(c36.5,5.5) 36.5,9.875 ccw(c36.5,5.5)
Bottom Layer:
  pour cut-out: 3,-0.354 cw(c3,3) -0.354,3 cw(c3,3) 3,6.354 cw(c3,3) 6.354,3 cw(c3,3)
  pour cut-out: 63,-0.354 cw(c63,3) 59.646,3 cw(c63,3) 63,6.354 cw(c63,3) 66.354,3 cw(c63,3)
  pour cut-out: 63,34.646 cw(c63,38) 59.646,38 cw(c63,38) 63,41.354 cw(c63,38) 66.354,38 cw(c63,38)
  pour cut-out: 3,34.646 cw(c3,38) -0.354,38 cw(c3,38) 3,41.354 cw(c3,38) 6.354,38 cw(c3,38)
  pour cut-out: 47.125,20.5 ccw(c51.5,20.5) 51.5,16.125 ccw(c51.5,20.5) 55.875,20.5 ccw(c51.5,20.5) 51.5,24.875 ccw(c51.5,20.5)
  pour cut-out: 32.125,35.5 ccw(c36.5,35.5) 36.5,31.125 ccw(c36.5,35.5) 40.875,35.5 ccw(c36.5,35.5) 36.5,39.875 ccw(c36.5,35.5)
  pour cut-out: 17.125,20.5 ccw(c21.5,20.5) 21.5,16.125 ccw(c21.5,20.5) 25.875,20.5 ccw(c21.5,20.5) 21.5,24.875 ccw(c21.5,20.5)
  pour cut-out: 32.125,5.5 ccw(c36.5,5.5) 36.5,1.125 ccw(c36.5,5.5) 40.875,5.5 ccw(c36.5,5.5) 36.5,9.875 ccw(c36.5,5.5)

## Silkscreen, mask and mechanical layers (free items; w line width, h text height)
Top Overlay:
  drawing of 216 lines, arcs and shapes, not listed
  text "SWD" at 51,35 h2
  text "090" at 37,31 h1 r90
  text "100" at 35.169,30.927 h1 r100
  text "080" at 38.816,30.754 h1 r80
  text "110" at 33.379,30.538 h1 r110
  text "070" at 40.561,30.196 h1 r70
  text "120" at 31.683,29.843 h1 r120
  text "060" at 42.183,29.343 h1 r60
  text "130" at 30.134,28.865 h1 r130
  text "050" at 43.632,28.222 h1 r50
  text "140" at 28.778,27.632 h1 r140
  text "040" at 44.865,26.866 h1 r40
  text "150" at 27.657,26.183 h1 r150
  text "030" at 45.843,25.317 h1 r30
  text "160" at 26.804,24.561 h1 r160
  text "020" at 46.538,23.621 h1 r20
  text "170" at 26.246,22.816 h1 r170
  text "010" at 46.927,21.831 h1 r10
  text "180" at 26,21 h1 r180
  text "000" at 47,20 h1
  text "0" at 47,20 h1
  text "190" at 26.073,19.169 h1 r190
  text "350" at 46.754,18.184 h1 r350
  text "SPI" at 71,17.75 h2 r90
  text "200" at 26.462,17.379 h1 r200
  text "340" at 46.196,16.439 h1 r340
  text "210" at 27.157,15.683 h1 r210
  text "330" at 45.343,14.817 h1 r330
  text "220" at 28.135,14.134 h1 r220
  text "320" at 44.222,13.368 h1 r320
  text "230" at 29.368,12.778 h1 r230
  text "ANSIN v1.0" at 3.5,12.5 h3 r90
  text "310" at 42.866,12.135 h1 r310
  text "240" at 30.817,11.657 h1 r240
  text "300" at 41.317,11.157 h1 r300
  text "250" at 32.439,10.804 h1 r250
  text "290" at 39.621,10.462 h1 r290
  text "260" at 34.184,10.246 h1 r260
  text "280" at 37.831,10.073 h1 r280
  text "270" at 36,10 h1 r270
Mechanical 1:
  circle w0.01: c36.5,20.5 r8
  lines w0.01: 0,3 ccw(c3,3) 3,0 72.5,0 ccw(c72.5,3) 75.5,3 75.5,38 ccw(c72.5,38) 72.5,41 3,41 ccw(c3,38) 0,38 0,3
Mechanical 2:
  circle w0.01: c51.5,20.5 r4.375
  circle w0.01: c36.5,35.5 r4.375
  circle w0.01: c21.5,20.5 r4.375
  circle w0.01: c36.5,5.5 r4.375
  circle w0.01: c36.5,20.5 r19
  circle w0.01: c36.5,20.5 r15
  lines w0.1: 36.5,22.5 36.5,20.5 ; 38.5,20.5 36.5,20.5 ; 36.5,20.5 34.5,20.5 36.5,20.5 ; 36.5,20.5 36.5,18.5 36.5,20.5

## Text inside footprints (layer, text, board x,y; h text height)
X1: Top Overlay "5" at 75.42,18.855 h0.6 r90; Top Overlay "6" at 70.984,18.78 h0.6 r90; Top Overlay "2" at 70.984,16.28 h0.6 r90; Top Overlay "1" at 75.42,16.355 h0.6 r90; Top Overlay "10" at 70.984,21.08 h0.6 r90; Top Overlay "9" at 75.42,21.395 h0.6 r90
X3: Top Overlay "9" at 50.625,40.785 h0.6 r180; Top Overlay "10" at 50.94,36.349 h0.6 r180; Top Overlay "1" at 55.665,40.785 h0.6 r180; Top Overlay "2" at 55.74,36.349 h0.6 r180; Top Overlay "6" at 53.24,36.349 h0.6 r180; Top Overlay "5" at 53.165,40.785 h0.6 r180